# Allegro board CutiePi_V2_0_1126.brd
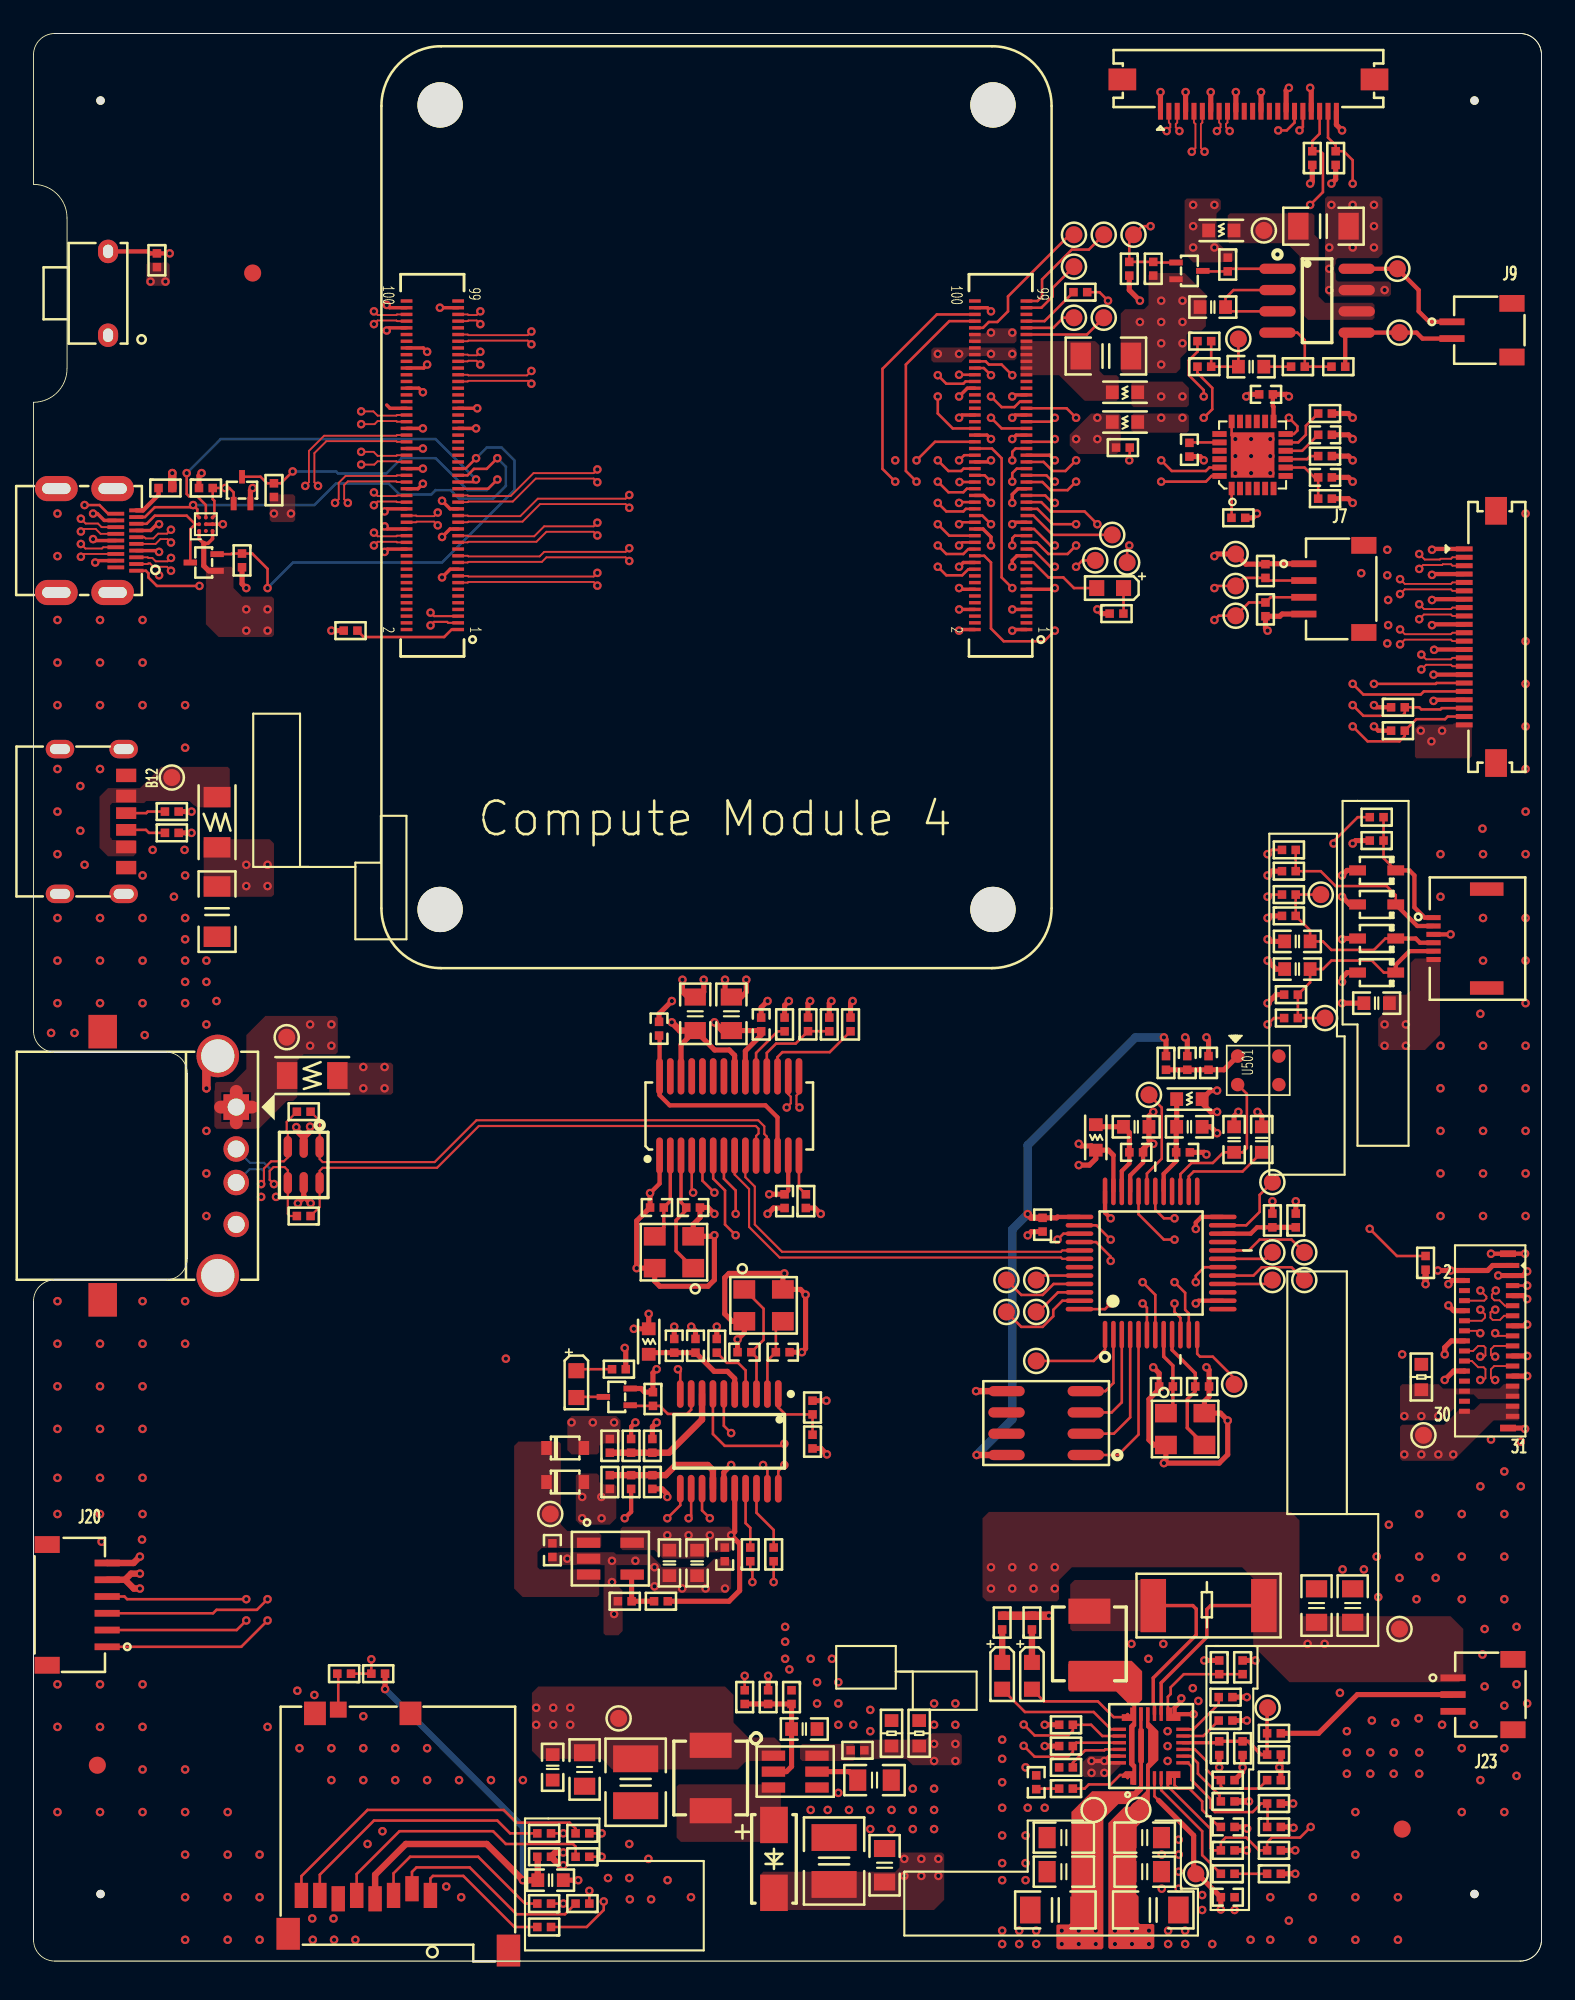
[diagram p0: board, top side]
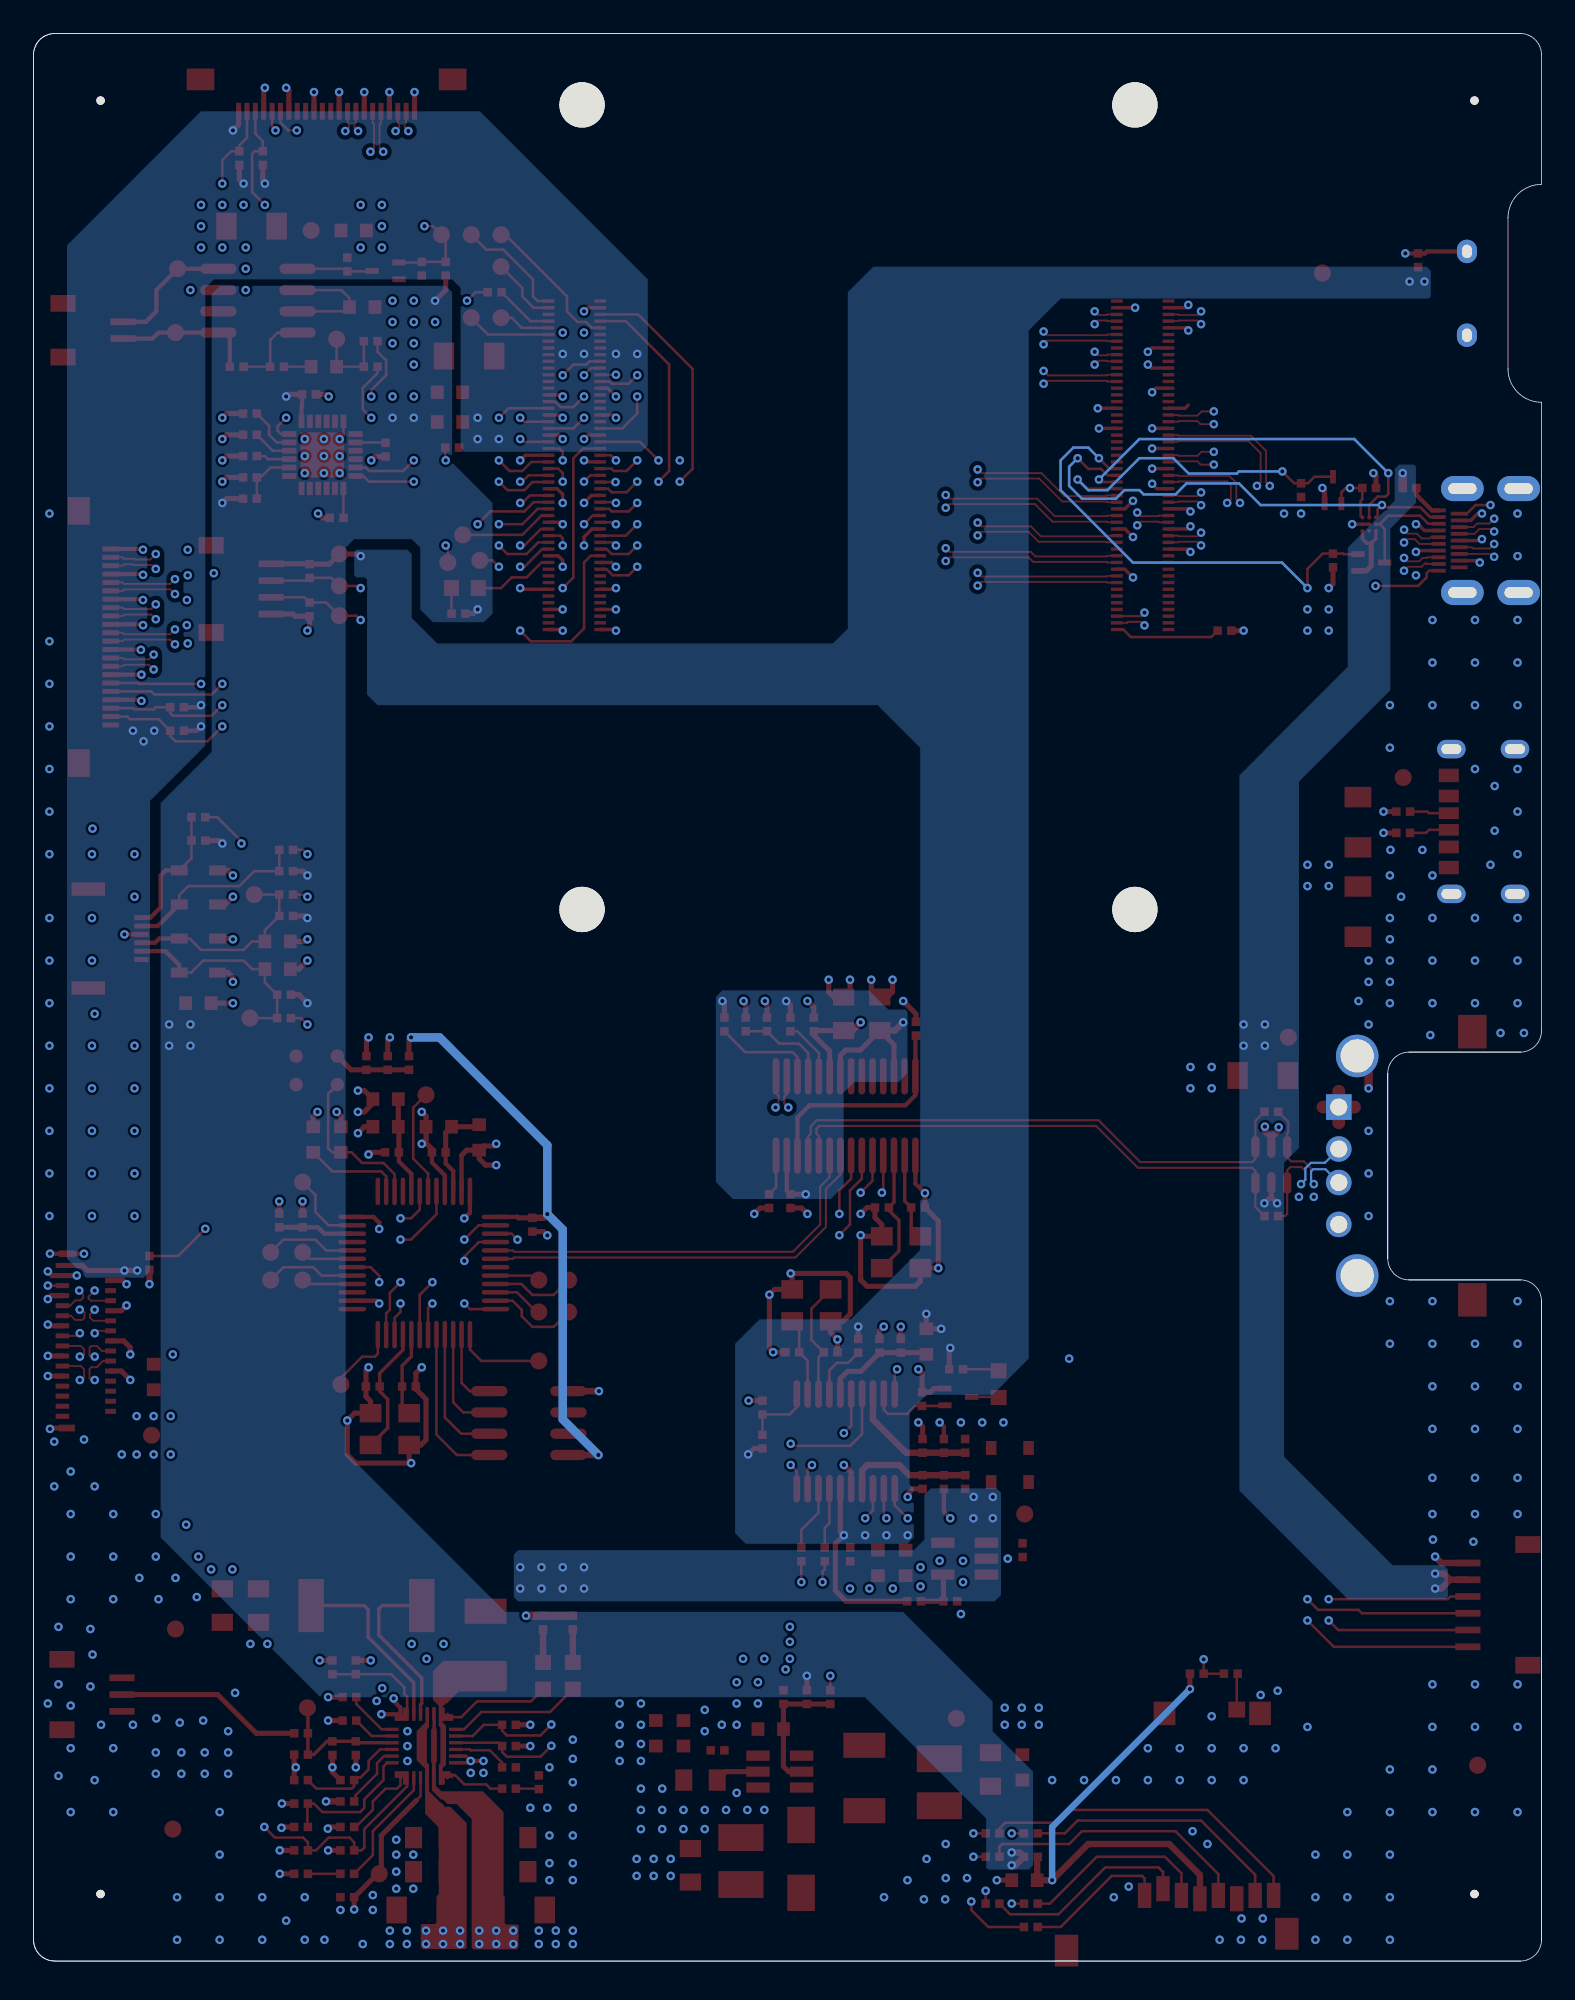
[diagram p1: board, bottom side, seen from below]

Outline 90.01 x 115 mm; copper layers: TOP, GND02, L03, L04, VCC05, BOTTOM. Coordinates in mm from the lower left corner of the outline.
Outline path: 1.27,115 arc(0.37,114.63) 0,113.73 0,106 arc(1.41,105.41) 2,104 2,95 arc(1.41,93.59) 0,93 0,55.5 arc(0.37,54.6) 1.27,54.23 ; 1.27,115 88.74,115 ; 1.27,115 88.74,115 ; 0,39.37 0,1.27 ; 0,39.37 arc(0.37,40.27) 1.27,40.64 ; 0,39.37 0,1.27 ; 0,1.27 arc(0.37,0.37) 1.27,0 ; 1.27,40.64 7.91,40.64 ; 1.27,40.64 7.91,40.64 ; 88.74,115 arc(89.64,114.63) 90.01,113.73 ; 88.74,115 arc(89.64,114.63) 90.01,113.73 ; 1.27,54.23 7.91,54.23 ; 1.27,54.23 7.91,54.23 ; 7.91,54.23 arc(8.81,53.86) 9.18,52.96 ; 7.91,40.64 arc(8.81,41.01) 9.18,41.91 ; 1.27,0 88.74,0 ; 1.27,0 88.74,0 ; 88.74,0 arc(89.64,0.37) 90.01,1.27 ; 88.74,0 arc(89.64,0.37) 90.01,1.27 ; 9.18,52.96 9.18,41.91 ; 9.18,52.96 9.18,41.91 ; 90.01,113.73 90.01,1.27 ; 90.01,113.73 90.01,1.27

## Design rules (mm)
net group CAM0_C: nets CAM0_CN CAM0_CP
net group CAM0_D0: nets CAM0_DN0 CAM0_DP0
net group CAM0_D1: nets CAM0_DN1 CAM0_DP1
net group CAM1_C: nets CAM1_CN CAM1_CP
net group CAM1_D0: nets CAM1_DN0 CAM1_DP0
net group CAM1_D1: nets CAM1_DN1 CAM1_DP1
net group CAM1_D2: nets CAM1_DN2 CAM1_DP2
net group CAM1_D3: nets CAM1_DN3 CAM1_DP3
net group DP_N12951086: nets N12951060 N12951086
net group DSI1_C: nets DSI1_CN DSI1_CP
net group DSI1_D0: nets DSI1_DN0 DSI1_DP0
net group DSI1_D1: nets DSI1_DN1 DSI1_DP1
net group DSI1_D2: nets DSI1_DN2 DSI1_DP2
net group DSI1_D3: nets DSI1_DN3 DSI1_DP3
net group HDMI_CK: nets HDMI_CK_N HDMI_CK_P
net group HDMI_D0: nets HDMI_D0_N HDMI_D0_P
net group HDMI_D1: nets HDMI_D1_N HDMI_D1_P
net group HDMI_D2: nets HDMI_D2_N HDMI_D2_P
net group RXD0: nets N12403491 RXD0
net group TXD0: nets N12403489 TXD0
net group USB: nets USB_N USB_P
net group USB1_: nets USB1_DM USB1_DP
net group USB2_: nets USB2_DM USB2_DP
net group VBUSA: nets N12836963 VBUSA
net group BOOST_EN: nets BOOST_EN CHARGE_EN N12951318

## Placement (name value [footprint] x y rotation side)
C2  47u/6.3V  [C1206]  10.96 62.61 270 top
C20  47u/6.3V  [C1206]  77 103.5 0 top
C24  4.7u/16V  [C0603]  30.86 4.83 0 top
C68  0.1uF/50V  [C0603]  30.99 11.56 270 top
C69  1.0uF/25V  [C0805]  32.89 11.43 270 top
C73  0.1uF/50V  [C0603]  46.01 13.84 0 top
C74  0.22uF/50V  [C0805]  50.2 10.79 0 top
C76  4.7uF/50V  [C1210]  47.79 5.97 90 top
C78  0.22uF/50V  [C0805]  50.8 5.71 90 top
C80  0.1uF/50V  [C0603]  80.17 57.15 180 top
C81  0.1uF/50V  [C0603]  75.44 60.83 180 top
C82  1000pF/50V  [C0603]  75.44 59.18 180 top
C85  4.7uF/50V  [C1210]  35.94 10.67 90 top
C86  4.7u/16V  [C0603]  70.39 98.68 180 top
C87  0.39u/16V  [C0603]  72.68 95.12 0 top
C383  -  [C0402]  77.09 88.52 0 top
C384  -  [C0402]  77.09 91.06 0 top
C385  -  [C0402]  73.57 93.47 180 top
C386  -  [C0402]  68.99 90.17 90 top
C2255  -  [C0402]  37.21 44.96 180 top
C2256  -  [C0402]  39.37 44.96 0 top
C2474  -  [C0402]  39.51 36.71 90 top
C2475  -  [C0402]  44.72 36.33 0 top
C2476  -  [C0402]  42.43 36.33 180 top
C2477  -  [C0402]  41.26 24.26 270 top
C2478  4.7u/16V  [C0603]  39.61 23.75 270 top
C2479  -  [C0402]  38.24 36.71 90 top
C2480  -  [C0402]  30.97 24.52 270 top
C2481  4.7u/16V  [C0603]  37.96 23.75 270 top
C2483  -  [C0402]  59.85 10.67 270 top
C2484  47u/6.3V  [C1206]  60.99 3.05 180 top
C2485  10u/16V  [C0805]  61.5 5.33 180 top
C2486  10u/16V  [C0805]  61.5 7.37 180 top
C2487  47u/6.3V  [C1206]  66.84 3.05 0 top
C2488  10u/16V  [C0805]  66.33 5.33 0 top
C2489  10u/16V  [C0805]  66.33 7.37 0 top
C2490  10u/16V  [C0805]  76.58 21.21 90 top
C2491  10u/16V  [C0805]  78.74 21.21 90 top
C2492  -  [C0402]  71.28 3.81 0 top
C2493  -  [C0402]  71.28 8 0 top
C2494  -  [C0402]  44.83 45.34 270 top
C2495  -  [C0402]  43.43 55.88 90 top
C2496  10u/16V  [C0805]  41.66 56.52 90 top
C2497  10u/16V  [C0805]  39.5 56.52 90 top
C2498  -  [C0402]  37.34 55.63 90 top
C2499  -  [C0402]  69.76 34.28 0 top
C2500  -  [C0402]  67.6 34.28 180 top
C2501  4.7u/16V  [C0603]  68.99 49.77 0 top
C2502  -  [C0402]  68.61 48.25 0 top
C2503  -  [C0402]  65.82 48.25 0 top
C2504  4.7u/16V  [C0603]  65.82 49.77 0 top
C2505  47u/6.3V  [C1206]  64.01 95.76 0 top
C2507  4.7u/16V  [C0603]  73.31 49.01 90 top
C2508  -  [C0402]  68.87 53.58 270 top
C2509  -  [C0402]  70.14 53.58 90 top
C2510  100pF  [C0603]  71.66 49.01 90 top
C2511  -  [C0402]  60.23 43.93 270 top
D1  -  [LED0603]  64.26 81.92 0 top
D10  SS14-M3/61T  [DO-214AC]  44.2 6.1 90 top
D11  ESDLIN1524BJ  [SOD323]  80.17 63.04 0 top
D12  ESDLIN1524BJ  [SOD323]  80.17 65.07 0 top
D13  ESDLIN1524BJ  [SOD323]  80.17 58.97 0 top
D14  ESDLIN1524BJ  [SOD323]  80.17 61.01 0 top
D17  BAT54HT1  [DIO-SOD323]  31.73 30.61 0 top
D18  BAT54HT1  [DIO-SOD323]  31.73 28.58 0 top
D19  -  [LED0603]  32.4 34.42 90 top
D20  -  [LED0603]  57.82 17.02 90 top
D21  -  [LED0603]  59.6 17.02 90 top
F1  6V/2A  [1206]  10.96 67.94 270 top
F2  6V/0.5A  [1206]  16.64 52.83 180 top
FB2  BLM18PG121SH1  [SL0603]  70.9 103.25 0 top
FB7  BLM18PG121SH1  [SL0603]  36.72 36.96 270 top
FB8  BLM18PG121SH1  [SL0603]  63.41 49.14 270 top
FB9  BLM18PG121SH1  [SL0603]  68.99 51.43 0 top
FB10  BLM18PG121SH1  [SL0603]  65.15 93.6 180 top
FB12  BLM18PG121SH1  [SL0603]  65.15 91.82 180 top
J2  Type C  [TYPE_C_P]  3.56 67.99 270 top
J7  -  [SH1_0_4]  75.82 81.87 90 top
J9  -  [SH1_0_2]  84.67 97.3 90 top
J11  -  [MOLEX_54548-2271]  85.4 79 90 top
J13  467651001  [MICRO_HDMI]  5.53 84.75 270 top
J14  -  [USB_AM]  12.1 47.45 0 top
J16  473521001_sd  [MOLEX_473521001]  21.78 7.81 0 top
J17  FH52-6S-0.5SH  [CONFPC6_05MM_FH52]  85.15 61 90 top
J20  -  [SH1_0_6]  4.4 21.25 270 top
J21  FH26W-31S-0.3SHW  [CONFPC31_03MM_FH26W]  86.85 37 90 top
J23  -  [SH1_0_3]  84.73 15.9 90 top
J24  DF40C-100DS-0.4V  [FCI_10033853_CM]  57.73 89.24 270 top
J25  DF40C-100DS-0.4V  [FCI_10033853_CM]  23.81 89.24 270 top
J26  -  [MOLEX_54548-2271]  72.52 110.36 180 top
L5  10uH/20%  [SHC0402]  40.42 10.92 270 top
L634  1.5u  [SHC0402]  63.03 18.92 90 top
NOREF  -  []  40.77 86.74 0 top
NOREF#2  -  [unnamed#2]  86.01 111 0 top
NOREF#3  -  [unnamed#2]  86.01 4 0 top
NOREF#4  -  [unnamed#3]  81.69 7.87 0 top
NOREF#5  -  []  99.99 96.76 0 top
NOREF#6  -  [unnamed#2]  4 111 0 top
NOREF#7  -  [unnamed#2]  4 4 0 top
NOREF#8  -  []  -66.42 36.7 0 top
NOREF#9  -  [unnamed#3]  13.08 100.71 0 top
NOREF#10  -  [unnamed#3]  3.81 11.68 0 top
NOREF#11  -  []  45.34 -8.51 0 top
NOREF#12  -  []  -58.9 96.01 0 top
NOREF#13  -  []  -66.42 -5.33 0 top
Q3  -  [SOT50P160X90-3N]  10.16 83.44 180 top
Q4  -  [SOT50P160X90-3N]  12.45 87.76 90 top
Q5  -  [SOT50P160X90-3N]  34.81 33.66 180 top
Q6  -  [SOT50P160X90-3N]  68.99 100.84 0 top
R3  -  [R0402]  64.64 80.39 0 top
R12  -  [R0402]  18.92 79.38 0 top
R15  -  [R0402]  12.45 83.57 270 top
R16  -  [R0402]  81.44 74.8 0 top
R17  -  [R0402]  81.44 73.41 0 top
R18  -  [R0402]  14.35 87.76 270 top
R42  -  [R0402]  74.93 66.29 180 top
R43  -  [R0402]  80.17 68.25 180 top
R87  -  [R0402]  45.25 15.75 270 top
R88  -  [R0402]  42.45 15.75 90 top
R89  -  [R0402]  49.18 12.57 180 top
R90  3.3/1%  [R0603]  52.87 13.59 90 top
R91  3.3/1%  [R0603]  51.21 13.59 90 top
R114  -  [R0402]  74.93 65.02 180 top
R115  -  [R0402]  80.17 66.85 180 top
R117  -  [R0402]  74.93 62.36 0 top
R118  -  [R0402]  75.06 57.66 0 top
R120  -  [R0402]  75.06 56.26 180 top
R121  -  [R0402]  74.93 63.63 180 top
R122  -  [R0402]  16.13 44.45 180 top
R123  -  [R0402]  16.13 50.67 180 top
R124  -  [R0402]  71.28 101.22 270 top
R125  -  [R0402]  77.88 95.12 180 top
R126  -  [R0402]  75.47 95.12 180 top
R127  -  [R0402]  69.88 96.65 0 top
R128  -  [R0402]  69.88 95.12 0 top
R272  -  [R0402]  40.78 36.71 90 top
R368  -  [R0402]  71.92 86.11 180 top
R370  -  [R0402]  77.09 87.25 180 top
R371  -  [R0402]  77.09 92.33 180 top
R373  -  [R0402]  77.09 89.79 180 top
R3039  -  [R0402]  46.5 33.02 90 top
R3040  -  [R0402]  46.5 30.99 270 top
R3041  -  [R0402]  42.78 24.26 90 top
R3042  -  [R0402]  44.18 24.26 90 top
R3043  -  [R0402]  73.53 82.93 270 top
R3044  -  [R0402]  73.53 80.64 270 top
R3049  -  [R0402]  37.45 21.47 180 top
R3051  -  [R0402]  35.29 21.47 0 top
R3052  -  [R0402]  34.4 28.58 270 top
R3053  -  [R0402]  36.94 28.58 270 top
R3054  -  [R0402]  7.37 101.47 270 top
R3057  -  [R0402]  83.09 41.66 90 top
R3058  -  [R0402]  7.87 87.88 0 top
R3059  -  [R0402]  36.97 33.53 270 top
R3060  -  [R0402]  34.94 35.31 180 top
R3061  -  [R0402]  66.84 100.97 90 top
R3062  -  [R0402]  10.29 87.88 0 top
R3063  NC_3.3/1%  [R0603]  82.84 34.84 90 top
R3064  -  [R0402]  34.4 30.74 90 top
R3065  -  [R0402]  36.94 30.74 90 top
R3066  -  [R0402]  43.85 15.75 270 top
R3086  -  [R0402]  74.04 10.79 180 top
R3087  -  [R0402]  61.63 10.29 0 top
R3088  -  [R0402]  71.28 10.79 180 top
R3089  20m/1W  [R2512]  70.14 21.21 0 top
R3090  -  [R0402]  74.04 9.4 180 top
R3091  -  [R0402]  74.04 8 0 top
R3092  -  [R0402]  74.04 6.6 180 top
R3093  -  [R0402]  71.28 6.6 0 top
R3094  -  [R0402]  61.63 14.1 180 top
R3095  -  [R0402]  57.82 20.19 90 top
R3096  -  [R0402]  61.63 12.83 180 top
R3097  -  [R0402]  71.28 9.53 0 top
R3098  -  [R0402]  74.04 13.59 180 top
R3099  -  [R0402]  61.63 11.56 0 top
R3100  -  [R0402]  59.6 20.19 90 top
R3101  -  [R0402]  70.77 12.7 90 top
R3102  -  [R0402]  70.77 17.53 270 top
R3103  -  [R0402]  72.17 12.7 90 top
R3104  -  [R0402]  72.17 17.53 270 top
R3105  -  [R0402]  71.28 5.21 180 top
R3106  -  [R0402]  71.15 14.35 180 top
R3107  -  [R0402]  71.15 15.75 180 top
R3108  -  [R0402]  74.04 5.21 0 top
R3132  -  [R0402]  20.57 17.14 0 top
R3133  -  [R0402]  8.26 68.58 0 top
R3134  -  [R0402]  8.26 67.31 0 top
R3137  -  [R0402]  74.04 12.32 180 top
R3138  -  [R0402]  30.48 2.03 180 top
R3139  -  [R0402]  32.77 3.43 180 top
R3140  -  [R0402]  30.48 3.43 180 top
R3141  -  [R0402]  32.77 6.22 180 top
R3142  -  [R0402]  30.48 7.62 180 top
R3143  -  [R0402]  32.77 7.62 180 top
R3144  -  [R0402]  18.54 17.14 180 top
R3145  -  [R0402]  65.41 100.97 270 top
R3146  -  [R0402]  76.33 107.57 90 top
R3147  -  [R0402]  77.72 107.57 90 top
R3148  -  [R0402]  46.1 45.34 90 top
R3149  -  [R0402]  48.77 55.88 90 top
R3150  -  [R0402]  46.23 55.88 90 top
R3151  -  [R0402]  47.5 55.88 90 top
R3152  -  [R0402]  44.83 55.88 90 top
R3153  -  [R0402]  30.48 6.22 180 top
R3154  -  [R0402]  35.67 28.58 270 top
R3155  -  [R0402]  35.67 30.74 90 top
R3156  -  [R0402]  62.48 99.57 180 top
R3157  -  [R0402]  65.02 90.3 0 top
R3158  -  [R0402]  67.6 53.58 270 top
R3159  -  [R0402]  75.34 44.19 90 top
R3160  -  [R0402]  73.95 44.19 270 top
REF  val  [unnamed#4]  24.27 110.74 0 top
REF#2  val  [unnamed#4]  57.27 110.74 0 top
REF#3  val  [unnamed#4]  57.27 62.74 0 top
REF#4  val  [unnamed#4]  24.27 62.74 0 top
SW2  TC-0143  [BUTTON]  4.45 99.5 270 top
TP28  TEST POINT  [TESTPOINT_39MIL]  76.83 63.63 90 top
TP29  TEST POINT  [TESTPOINT_39MIL]  77.09 56.26 90 top
TP30  TEST POINT  [TESTPOINT_39MIL]  34.92 14.48 270 top
TP33  TEST POINT  [TESTPOINT_39MIL]  82.96 31.37 0 top
TP41  TEST POINT  [TESTPOINT_39MIL]  8.26 70.61 0 top
TP43  TEST POINT  [TESTPOINT_39MIL]  63.28 9.02 0 top
TP44  TEST POINT  [TESTPOINT_39MIL]  81.53 19.81 0 top
TP45  TEST POINT  [TESTPOINT_39MIL]  69.38 5.21 0 top
TP46  TEST POINT  [TESTPOINT_39MIL]  65.95 9.02 0 top
TP47  TEST POINT  [TESTPOINT_39MIL]  73.66 15.11 0 top
TP52  TEST POINT  [TESTPOINT_39MIL]  15.11 55.12 0 top
TP57  TEST POINT  [TESTPOINT_39MIL]  73.44 103.25 90 top
TP58  TEST POINT  [TESTPOINT_39MIL]  71.92 96.77 90 top
TP59  TEST POINT  [TESTPOINT_39MIL]  65.66 103 90 top
TP60  TEST POINT  [TESTPOINT_39MIL]  81.53 97.16 0 top
TP61  TEST POINT  [TESTPOINT_39MIL]  81.41 100.97 0 top
TP62  TEST POINT  [TESTPOINT_39MIL]  71.75 82.04 270 top
TP63  TEST POINT  [TESTPOINT_39MIL]  71.75 80.26 270 top
TP64  TEST POINT  [TESTPOINT_39MIL]  30.84 26.67 180 top
TP65  TEST POINT  [TESTPOINT_39MIL]  71.75 83.95 270 top
TP67  TEST POINT  [TESTPOINT_39MIL]  59.85 40.63 90 top
TP68  TEST POINT  [TESTPOINT_39MIL]  59.85 35.8 90 top
TP69  TEST POINT  [TESTPOINT_39MIL]  71.66 34.41 90 top
TP70  TEST POINT  [TESTPOINT_39MIL]  73.95 40.63 90 top
TP71  TEST POINT  [TESTPOINT_39MIL]  75.85 40.63 90 top
TP72  TEST POINT  [TESTPOINT_39MIL]  73.95 42.28 90 top
TP73  TEST POINT  [TESTPOINT_39MIL]  75.85 42.28 90 top
TP74  TEST POINT  [TESTPOINT_39MIL]  58.07 40.63 90 top
TP75  TEST POINT  [TESTPOINT_39MIL]  58.07 38.73 90 top
TP76  TEST POINT  [TESTPOINT_39MIL]  59.85 38.73 90 top
TP77  TEST POINT  [TESTPOINT_39MIL]  63.88 98.04 90 top
TP78  TEST POINT  [TESTPOINT_39MIL]  62.1 98.04 90 top
TP79  TEST POINT  [TESTPOINT_39MIL]  62.1 101.09 90 top
TP80  TEST POINT  [TESTPOINT_39MIL]  63.88 103 90 top
TP81  TEST POINT  [TESTPOINT_39MIL]  66.58 51.68 90 top
TP82  TEST POINT  [TESTPOINT_39MIL]  73.95 46.47 90 top
TP83  TEST POINT  [TESTPOINT_39MIL]  62.1 103 90 top
TP84  TEST POINT  [TESTPOINT_39MIL]  65.28 83.44 90 top
TP89  TEST POINT  [TESTPOINT_39MIL]  63.37 83.57 90 top
TP90  TEST POINT  [TESTPOINT_39MIL]  64.39 85.09 90 top
U3  CM108AH  [QFN48_05MM_0707MMLTS]  66.71 41.65 90 top
U4  -  [ONSEMI_ESD5384]  10.29 85.72 90 top
U5  IP4234CZ6  [TSOP6]  16.13 47.5 180 top
U6  -  [SOT23_6B]  45.47 11.3 270 top
U12  LM4871MX  [SOIC8_1D27MM]  76.61 99.06 270 top
U18  stm32f030f4p6  [TSSOP20_0D65MM]  41.53 31.01 180 top
U57  MPU6050  [QFN24_05MM_0404MML]  72.76 89.86 90 top
U60  -  [SOT23_5]  34.43 24.01 270 top
U501  -  [LGA5_CAV_4P1X3P1MM]  71.87 52.29 90 top
U580  AT93C46  [SOIC8]  60.44 32.1 90 top
U597  MP2636GR  [QFN-30]  66.71 12.83 90 top
U600  FE1.1S  [SSOP28]  41.53 50.42 0 top
Y2  -  [XTAL-3225_25M]  43.58 39.12 180 top
Y10  -  [XTAL-3225_25M]  38.23 42.29 0 top
Y11  -  [XTAL-3225_25M]  68.74 31.74 180 top

## Library data of the parts
C2 C20 C2484 C2487 C2505 = CAP_3216_6.3V_47u: Tolerance: tol*
C24 C86 C87 C2478 C2481 C2501 C2504 C2507 = CAP_1608_6.3V_4.7u: Tolerance: tol*
C68 C69 C73 C74 C76 C78 C82 C85 C2510 = CAP: Tolerance: tol*
C80 C81 = CAP_0: Tolerance: tol*
C383-C386 C2474 C2477 C2479 C2483 C2492-C2495 C2498 C2502 C2503 C2508 C2509 C2511 = CAP_1005_6.3V_100n
C2255 C2256 C2499 C2500 = CAP_NP: signal model: DEFAULT_CAPACITOR_10000pF_2_1; room: ATLAS-AP
C2475 C2476 = C_0603_22P/50V/5%
C2480 = CAP_1005_6.3V_1u
C2485 C2486 C2488-C2491 C2496 C2497 = CAP_2012_6.3V_10u: Tolerance: tol*
D1 = LED_1608_RED_0
D10 = S100: User Part Number: pn
D11-D14 = SMAJ30CA: User Part Number: PN
D17 D18 = DIODE_0: User Part Number: PN
D19-D21 = LED_1608_GREEN_0
F1 F2 = FUSE_POLY_2.0A_6V: Tolerance: tol*
FB2 FB7-FB10 FB12 = INDUCTOR_0: Tolerance: tol*; room: USB+5V
J2 = CON_uUSB_B_3: User Part Number: PN
J7 = A2002WV-6P_7
J9 = A2002WV-6P_8
J11 J26 = CON_22W_FFC_54548-2271
J13 = CON_HDMI_RA: User Part Number: PN
J14 = CON_USBA_RA_PTH_0
J16 = CON_uSD_2: User Part Number: PN
J17 = A2002WV-6P_3: User Part Number: PN
J20 = A2002WV-6P_2
J21 = CON32_1: User Part Number: PN
J23 = A2002WV-6P_4
J24 J25 = CON_200W_DDR2SODIMM_CM_2: User Part Number: PN
L5 = IND: User Part Number: pn
L634 = IND_4u7_SRN4018-4R7M: User Part Number: pn
Q3-Q6 = MOSFET_N_DMG1012T
R3 R3060 = RES_1005_470R
R12 = RES_1005_1K
R15 = RES_1005_27K
R16 R17 R3146 R3147 = RES_1005_1.8K
R18 R3059 R3061 R3062 R3133 R3134 R3145 R3159 R3160 = RES_1005_100K
R42 R43 R87-R89 R120-R123 R127 R128 R368 R370 R371 R373 R3052 R3057 R3064 R3066 R3086-R3088 R3090-R3093 R3095 R3097-R3108 R3137 R3148-R3158 = RES
R90 R91 R3063 R3089 = RES: Tolerance: tol*
R114 R115 R117 R118 R124-R126 R3049 R3051 R3053 R3065 = RES_0
R272 R3054 = R_0603_10K/5%
R3039 R3040 = R_0402_22R/5%
R3041 R3042 R3058 R3094 R3096 = R_1: signal model: DEFAULT_RESISTOR_0.001OHM_1_2
R3043 R3044 = R_0603/4.7K/5%
R3132 R3138-R3144 = RES_1005_47K
REF REF#2-REF#4 = -: User Part Number: pn
SW2 = SKEG_DIP2_2: User Part Number: PN
TP28-TP30 TP33 TP41 TP43-TP47 TP52 TP57-TP65 TP67-TP84 TP89 TP90 = Test pad: Tolerance: *; User Part Number: *; room: P10-PMIC
U3 = LSD4WF-00007010_0: User Part Number: pn
U4 = IC_ESD5384_1
U5 = TMP100-Q1_0: User Part Number: pn
U6 = TPS61165TDB
U12 = SMD_EEPROM_SO8_0: User Part Number: pn
U18 = XF6000SYE_1: User Part Number: pn
U57 = TUSB1210BRHBT_2: User Part Number: PN
U60 = LP3470/SOT23_1
U501 = ADMP421_LGA5_1
U580 = PCA9306IDCURQ1_0: User Part Number: pn
U597 = STM8AF6226TA_5: User Part Number: PN
U600 = NEO-M8L_0: User Part Number: pn
Y2 = X_0
Y10 Y11 = XTAL_13Y

## Footprints (pads in the part's own frame, mm; a bottom-side part is the same pattern mirrored in y, then rotated)
1206
  rect 1.219x1.6 smd: 1(-1.5,0) 2(1.5,0)
BUTTON
  oval 1.4x1.2 hole 0.8x0.6: 1(2.5,0) 2(-2.5,0)
C0402
  rect 0.508x0.508 smd: 1(-0.41,0) 2(0.41,0)
C0603
  rect 0.762x0.813 smd: 1(-0.76,0) 2(0.76,0)
C0805
  rect 1.016x1.27 smd: 1(-1,0) 2(1,0)
C1206
  rect 1.219x1.6 smd: 1(-1.5,0) 2(1.5,0)
C1210
  rect 1.6x2.692 smd: 1(-1.4,0) 2(1.4,0)
CONFPC6_05MM_FH52
  rect 0.3x0.85 smd: 1(1.25,1.587) 2(0.75,1.587) 3(0.25,1.587) 4(-0.25,1.587) 5(-0.75,1.587) 6(-1.25,1.587)
  rect 0.8x2 smd: 7(-2.95,-1.587) 8(2.95,-1.587)
CONFPC31_03MM_FH26W
  rect 0.3x0.8 smd: 1(4.5,-1.437) 3(3.9,-1.437) 5(3.3,-1.437) 7(2.7,-1.437) 9(2.1,-1.437) 11(1.5,-1.437) 13(0.9,-1.437) 15(0.3,-1.437) 17(-0.3,-1.437) 19(-0.9,-1.437) 21(-1.5,-1.437) 23(-2.1,-1.437) 25(-2.7,-1.437) 27(-3.3,-1.437) 29(-3.9,-1.437) 31(-4.5,-1.437)
  rect 0.3x0.65 smd: 2(4.2,1.437) 4(3.6,1.437) 6(3,1.437) 8(2.4,1.437) 10(1.8,1.437) 12(1.2,1.437) 14(0.6,1.437) 16(0,1.437) 18(-0.6,1.437) 20(-1.2,1.437) 22(-1.8,1.437) 24(-2.4,1.437) 26(-3,1.437) 28(-3.6,1.437) 30(-4.2,1.437)
  rect 0.4x0.95 smd: G1(-5.2,-1.165) G2(5.2,-1.165)
DIO-SOD323
  rect 0.63x0.83 smd: 1(-1.115,0) 2(1.115,0)
DO-214AC
  rect 2.17x1.65 smd: A(2.025,0) C(-2.025,0)
FCI_10033853_CM
  rect 0.2x0.7 smd: 1(9.8,1.54) 2(9.8,-1.54) 3(9.4,1.54) 4(9.4,-1.54) 5(9,1.54) 6(9,-1.54) 7(8.6,1.54) 8(8.6,-1.54) 9(8.2,1.54) 10(8.2,-1.54) 11(7.8,1.54) 12(7.8,-1.54) 13(7.4,1.54) 14(7.4,-1.54) 15(7,1.54) 16(7,-1.54) 17(6.6,1.54) 18(6.6,-1.54) 19(6.2,1.54) 20(6.2,-1.54) 21(5.8,1.54) 22(5.8,-1.54) 23(5.4,1.54) 24(5.4,-1.54) 25(5,1.54) 26(5,-1.54) 27(4.6,1.54) 28(4.6,-1.54) 29(4.2,1.54) 30(4.2,-1.54) 31(3.8,1.54) 32(3.8,-1.54) 33(3.4,1.54) 34(3.4,-1.54) 35(3,1.54) 36(3,-1.54) 37(2.6,1.54) 38(2.6,-1.54) 39(2.2,1.54) 40(2.2,-1.54) 41(1.8,1.54) 42(1.8,-1.54) 43(1.4,1.54) 44(1.4,-1.54) 45(1,1.54) 46(1,-1.54) 47(0.6,1.54) 48(0.6,-1.54) 49(0.2,1.54) 50(0.2,-1.54) 51(-0.2,1.54) 52(-0.2,-1.54) 53(-0.6,1.54) 54(-0.6,-1.54) 55(-1,1.54) 56(-1,-1.54) 57(-1.4,1.54) 58(-1.4,-1.54) 59(-1.8,1.54) 60(-1.8,-1.54) 61(-2.2,1.54) 62(-2.2,-1.54) 63(-2.6,1.54) 64(-2.6,-1.54) 65(-3,1.54) 66(-3,-1.54) 67(-3.4,1.54) 68(-3.4,-1.54) 69(-3.8,1.54) 70(-3.8,-1.54) 71(-4.2,1.54) 72(-4.2,-1.54) 73(-4.6,1.54) 74(-4.6,-1.54) 75(-5,1.54) 76(-5,-1.54) 77(-5.4,1.54) 78(-5.4,-1.54) 79(-5.8,1.54) 80(-5.8,-1.54) 81(-6.2,1.54) 82(-6.2,-1.54) 83(-6.6,1.54) 84(-6.6,-1.54) 85(-7,1.54) 86(-7,-1.54) 87(-7.4,1.54) 88(-7.4,-1.54) 89(-7.8,1.54) 90(-7.8,-1.54) 91(-8.2,1.54) 92(-8.2,-1.54) 93(-8.6,1.54) 94(-8.6,-1.54) 95(-9,1.54) 96(-9,-1.54) 97(-9.4,1.54) 98(-9.4,-1.54) 99(-9.8,1.54) 100(-9.8,-1.54)
LED0603
  rect 0.9x0.95 smd: 1(0.8,0) 2(-0.8,0)
LGA5_CAV_4P1X3P1MM
  round 0.8 smd: 1(1.7,0) 2(1.7,-2.46) 3(0,-2.46) 4(0,0)
MICRO_HDMI
  rect 0.23x0.85 smd: 1(1.8,0.612) 3(1.4,0.612) 5(1,0.612) 7(0.6,0.612) 9(0.2,0.612) 11(-0.2,0.612) 13(-0.6,0.612) 15(-1,0.612) 17(-1.4,0.612) 19(-1.8,0.612)
  rect 0.23x1 smd: 2(1.6,-0.612) 4(1.2,-0.612) 6(0.8,-0.612) 8(0.4,-0.612) 10(0,-0.612) 12(-0.4,-0.612) 14(-0.8,-0.612) 16(-1.2,-0.612) 18(-1.6,-0.612)
  oval 1.5x2.55 hole 0.65x1.7: 20(3.1,-4.163) 21(-3.1,-0.802) 22(3.1,-0.802) 23(-3.1,-4.163)
MOLEX_54548-2271
  rect 1.65x1.3 smd: (-7.525,-1.9) (7.525,-1.9)
  rect 0.3x1 smd: 1(5.25,0) 2(4.75,0) 3(4.25,0) 4(3.75,0) 5(3.25,0) 6(2.75,0) 7(2.25,0) 8(1.75,0) 9(1.25,0) 10(0.75,0) 11(0.25,0) 12(-0.25,0) 13(-0.75,0) 14(-1.25,0) 15(-1.75,0) 16(-2.25,0) 17(-2.75,0) 18(-3.25,0) 19(-3.75,0) 20(-4.25,0) 21(-4.75,0) 22(-5.25,0)
MOLEX_473521001
  rect 0.8x1.5 smd: 1(1.915,-3.898) 2(0.815,-3.498) 3(-0.285,-3.898) 4(-1.385,-4.098) 5(-2.485,-3.898) 6(-3.585,-4.098) 7(-4.685,-3.898) 8(-5.785,-3.898)
  rect 1x0.95 smd: 9(-3.585,7.187)
  rect 1.4x1.9 smd: 10(6.575,-7.187) 11(-6.575,-6.187)
  rect 1.3x1.4 smd: 12(-4.975,6.962) 13(0.725,6.962)
ONSEMI_ESD5384
  round 0.235 smd: A1(-0.4,0.4) A2(0,0.4) A3(0.4,0.4) B1(-0.4,0) B2(0,0) B3(0.4,0) C1(-0.4,-0.4) C2(0,-0.4) C3(0.4,-0.4)
QFN24_05MM_0404MML
  rect 0.8x0.35 smd: 1(-2,1.25) 2(-2,0.75) 3(-2,0.25) 4(-2,-0.25) 5(-2,-0.75) 6(-2,-1.25) 13(2,-1.25) 14(2,-0.75) 15(2,-0.25) 16(2,0.25) 17(2,0.75) 18(2,1.25)
  rect 0.35x0.85 smd: 7(-1.25,-1.975) 8(-0.75,-1.975) 9(-0.25,-1.975) 10(0.25,-1.975) 11(0.75,-1.975) 12(1.25,-1.975) 19(1.25,1.975) 20(0.75,1.975) 21(0.25,1.975) 22(-0.25,1.975) 23(-0.75,1.975) 24(-1.25,1.975)
  rect 2.7x2.6 smd: 25(0,0)
QFN48_05MM_0707MMLTS
  oval 1.65x0.27 smd: 1(-4.275,2.75) 2(-4.275,2.25) 3(-4.275,1.75) 4(-4.275,1.25) 5(-4.275,0.75) 6(-4.275,0.25) 7(-4.275,-0.25) 8(-4.275,-0.75) 9(-4.275,-1.25) 10(-4.275,-1.75) 11(-4.275,-2.25) 12(-4.275,-2.75) 25(4.275,-2.75) 26(4.275,-2.25) 27(4.275,-1.75) 28(4.275,-1.25) 29(4.275,-0.75) 30(4.275,-0.25) 31(4.275,0.25) 32(4.275,0.75) 33(4.275,1.25) 34(4.275,1.75) 35(4.275,2.25) 36(4.275,2.75)
  oval 0.27x1.65 smd: 13(-2.75,-4.275) 14(-2.25,-4.275) 15(-1.75,-4.275) 16(-1.25,-4.275) 17(-0.75,-4.275) 18(-0.25,-4.275) 19(0.25,-4.275) 20(0.75,-4.275) 21(1.25,-4.275) 22(1.75,-4.275) 23(2.25,-4.275) 24(2.75,-4.275) 37(2.75,4.275) 38(2.25,4.275) 39(1.75,4.275) 40(1.25,4.275) 41(0.75,4.275) 42(0.25,4.275) 43(-0.25,4.275) 44(-0.75,4.275) 45(-1.25,4.275) 46(-1.75,4.275) 47(-2.25,4.275) 48(-2.75,4.275)
QFN-30
  custom 0.8x0.7 smd: 1(-1.9,1.4) 8(-1.9,-1.4) 15(1.9,-1.4) 22(1.9,1.4)
  rect 0.8x0.2 smd: 2(-1.9,1) 3(-1.9,0.6) 4(-1.9,0.2) 5(-1.9,-0.2) 6(-1.9,-0.6) 7(-1.9,-1) 16(1.9,-1) 17(1.9,-0.6) 18(1.9,-0.2) 19(1.9,0.2) 20(1.9,0.6) 21(1.9,1)
  rect 0.2x0.8 smd: 9(-1,-1.9) 10(-0.6,-1.9) 11(-0.2,-1.9) 12(0.2,-1.9) 13(0.6,-1.9) 14(1,-1.9) 23(1,1.9) 24(0.6,1.9) 25(0.2,1.9) 26(-0.2,1.9) 27(-0.6,1.9) 28(-1,1.9)
  rect 1.8x0.3 smd: 29(0,0.6) 30(0,0)
R0402
  rect 0.508x0.508 smd: 1(-0.41,0) 2(0.41,0)
R0603
  rect 0.762x0.813 smd: 1(-0.76,0) 2(0.76,0)
R2512
  rect 1.524x3.175 smd: 1(-3.3,0) 2(3.3,0)
SH1_0_2
  rect 1x1.5 smd: (-1.6,-3.58) (1.6,-3.58)
  rect 0.4x1.5 smd: 1(0.5,0) 2(-0.5,0)
SH1_0_3
  rect 1x1.5 smd: (-2.1,-3.58) (2.1,-3.58)
  rect 0.4x1.5 smd: 1(1,0) 2(0,0) 3(-1,0)
SH1_0_4
  rect 1x1.5 smd: (-2.6,-3.58) (2.6,-3.58)
  rect 0.4x1.5 smd: 1(1.5,0) 2(0.5,0) 3(-0.5,0) 4(-1.5,0)
SH1_0_6
  rect 1x1.5 smd: (-3.6,-3.58) (3.6,-3.58)
  rect 0.4x1.5 smd: 1(2.5,0) 2(1.5,0) 3(0.5,0) 4(-0.5,0) 5(-1.5,0) 6(-2.5,0)
SHC0402
  rect 1.5x2.5 smd: 1(-1.95,0) 2(1.95,0)
SL0603
  rect 0.762x0.813 smd: 1(-0.76,0) 2(0.76,0)
SOD323
  rect 1x0.6 smd: A(-1.14,0) C(1.14,0)
SOIC8
  oval 0.61x2.17 smd: 1(-1.905,-2.365) 2(-0.635,-2.365) 3(0.635,-2.365) 4(1.905,-2.365) 5(1.905,2.365) 6(0.635,2.365) 7(-0.635,2.365) 8(-1.905,2.365)
SOIC8_1D27MM
  oval 0.61x2.17 smd: 1(-1.905,-2.365) 2(-0.635,-2.365) 3(0.635,-2.365) 4(1.905,-2.365) 5(1.905,2.365) 6(0.635,2.365) 7(-0.635,2.365) 8(-1.905,2.365)
SOT23_5
  rect 0.61x1.397 smd: 1(-0.95,-1.3) 2(0,-1.3) 3(0.95,-1.3) 4(0.95,1.3) 5(-0.95,1.3)
SOT23_6B
  rect 0.61x1.397 smd: 1(-0.95,-1.3) 2(0,-1.3) 3(0.95,-1.3) 4(0.95,1.3) 5(0,1.3) 6(-0.95,1.3)
SOT50P160X90-3N
  rect 0.8x0.35 smd: 1(-0.8,0.5) 2(-0.8,-0.5) 3(0.8,0)
SSOP28
  oval 0.4x2.17 smd: 1(-4.16,-2.365) 2(-3.52,-2.365) 3(-2.88,-2.365) 4(-2.24,-2.365) 5(-1.6,-2.365) 6(-0.96,-2.365) 7(-0.32,-2.365) 8(0.32,-2.365) 9(0.96,-2.365) 10(1.6,-2.365) 11(2.24,-2.365) 12(2.88,-2.365) 13(3.52,-2.365) 14(4.16,-2.365) 15(4.16,2.365) 16(3.52,2.365) 17(2.88,2.365) 18(2.24,2.365) 19(1.6,2.365) 20(0.96,2.365) 21(0.32,2.365) 22(-0.32,2.365) 23(-0.96,2.365) 24(-1.6,2.365) 25(-2.24,2.365) 26(-2.88,2.365) 27(-3.52,2.365) 28(-4.16,2.365)
TESTPOINT_39MIL
  round 1.016 smd: 1(0,0)
TSOP6
  oval 0.5x1.3 smd: 1(-0.95,-1.075) 2(0,-1.075) 3(0.95,-1.075) 4(0.95,1.075) 5(0,1.075) 6(-0.95,1.075)
TSSOP20_0D65MM
  oval 0.4x1.65 smd: 1(-2.925,-2.825) 2(-2.275,-2.825) 3(-1.625,-2.825) 4(-0.975,-2.825) 5(-0.325,-2.825) 6(0.325,-2.825) 7(0.975,-2.825) 8(1.625,-2.825) 9(2.275,-2.825) 10(2.925,-2.825) 11(2.925,2.825) 12(2.275,2.825) 13(1.625,2.825) 14(0.975,2.825) 15(0.325,2.825) 16(-0.325,2.825) 17(-0.975,2.825) 18(-1.625,2.825) 19(-2.275,2.825) 20(-2.925,2.825)
TYPE_C_P
  oval 1.1x1.7 hole 0.6x1.2: 1(-4.32,1.825) 2(-4.32,-1.975) 3(4.32,-1.975) 4(4.32,1.825)
  rect 0.7x1.2 smd: A5(-0.5,1.975) B5(0.5,1.975)
  rect 0.76x1.2 smd: A9(1.52,1.975) B9(-1.52,1.975)
  rect 0.8x1.2 smd: A12(2.75,1.975) B12(-2.75,1.975)
unnamed#2
  round 0.5 hole 3.4 unplated: (0,0)
unnamed#3
  round 1.016 smd: (0,0)
unnamed#4
  round 2.7 hole 2.7 unplated: (0,0)
USB_AM
  rect 1.524x1.524 hole 1.016: 1(0,3.5)
  round 1.524 hole 1.016: 2(0,1) 3(0,-1) 4(0,-3.5)
  round 2.54 hole 1.981: 5(-1.1,6.55) 6(-1.1,-6.55)
  rect 1.7x2 smd: 7(-7.97,8) 8(-7.97,-8)
XTAL-3225_25M
  rect 1.3x1.1 smd: 1(1.15,-0.95) 2(-1.15,-0.95) 3(-1.15,0.95) 4(1.15,0.95)

## Nets
3V3: C80.1 C385.1 FB12.1 J17.6 R3.1 R114.2 R115.2 R117.1 R118.1 R370.1(A) R3066.1(A) R3145.2 R3153.1(A) U57.13(VDD)
3V3_SD: C24.1 J16.4(VDD) R3132.2 R3153.2(B)
5V: C2.1 C2487.1 C2488.1 C2489.1 D17.2 F1.2(P2) R3064.2(B) R3091.2(B) R3093.2(B) TP46.1(PIN1) U597.4(VIN1) U597.19(VIN3) U597.30(VIN2)
GND: C2.2 C20.2 C24.2 C68.2 C69.2 C73.2 C74.2 C76.2 C78.2 C80.2 C81.2 C82.2 C85.1 C86.2 C383.2 C384.2 C385.2 C386.1 C2255.2 C2256.2 C2474.2 C2475.2 C2476.2 C2477.2 C2478.2 C2479.2 C2480.2 C2481.2 C2483.1 C2484.2 C2485.2 C2486.2 C2487.2 C2488.2 C2489.2 C2490.2 C2491.2 C2492.2 C2493.2 C2494.2 C2495.2 C2496.2 C2497.2 C2498.2 C2499.2 C2500.2 C2501.2 C2502.2 C2503.2 C2504.2 C2505.2 C2507.2 C2508.1 C2509.2 C2510.2 C2511.2 D11.A D12.A D13.A D14.A J2.1(SH1) J2.2(SH2) J2.3(SH3) J2.4(SH4) J2.A12 J2.B12 J7.4 J11.1(P1) J11.4(P4) J11.7(P7) J11.10(P10) J11.13(P13) J11.16(P16) J11.19(P19) J13.4(P4) J13.7(P7) J13.10(P10) J13.13(P13) J13.16(P16) J13.20(SH1) J13.21(SH2) J13.22(SH3) J13.23(SH4) J14.4(P4) J14.5(P5) J14.6(P6) J14.7(P7) J14.8(P8) J16.6(VSS) J16.10(SH1) J16.11(SH2) J16.12(SH3) J16.13(SH4) J17.3 J17.7(G1) J17.8(G2) J20.6 J21.4 J21.7 J21.10 J21.13 J21.16 J21.19 J21.22 J21.23 J21.G1 J21.G2 J23.3 J24.1 J24.2 J24.7 J24.8 J24.13 J24.14 J24.22 J24.23 J24.32 J24.33 J24.42 J24.43 J24.52 J24.53 J24.59 J24.60 J24.65 J24.66 J24.71 J24.74 J24.98 J25.7 J25.8 J25.13 J25.14 J25.19 J25.20 J25.25 J25.26 J25.31 J25.32 J25.37 J25.38 J25.44 J25.50 J25.55 J25.56 J25.61 J25.62 J25.67 J25.68 J25.73 J25.74 J25.79 J25.80 J25.85 J25.86 J25.91 J25.92 J25.97 J25.98 J26.1(P1) J26.4(P4) J26.7(P7) J26.10(P10) J26.13(P13) J26.16(P16) J26.19(P19) Q4.2(S) Q5.2(S) Q6.2(S) R12.1 R87.1(A) R90.2(B) R91.2(B) R368.1(A) R371.1(A) R373.1(A) R3039.2 R3044.2 R3051.1 R3053.2 R3059.1 R3061.1 R3062.1 R3063.2(B) R3065.2 R3088.1(A) R3090.1(A) R3092.1(A) R3099.1(A) R3103.1(A) R3104.1(A) R3106.1(A) R3107.1(A) R3108.2(B) R3133.2 R3134.2 R3148.1(A) R3150.2(B) R3160.1 SW2.1 U3.14(DVSS1) U3.24(AVSS1) U3.33(AVSS2) U3.36(DVSS2) U4.B2(COM1) U4.C2(COM0) U5.2(GND) U6.4(GND) U12.7(GND) U18.15(VSS) U57.18(GND) U57.25(G) U60.2(GND) U501.2(GND1) U501.3(GND2) U580.5(GND) U597.15(AGND) U597.27(PGND1) U597.28(PGND2) U600.1(VSS) Y2.2 Y2.4 Y10.2 Y10.4 Y11.2 Y11.4
VBAT: C2490.1 C2491.1 D18.2 J23.1 R3052.2(B) R3089.2(B) R3095.2(B) R3097.2(B) R3100.2(B) TP44.1(PIN1) U597.17(BAT)
VBAT_AD: R3052.1(A) R3053.1 R3154.1(A) U18.14(ADC_9)
VBAT_AD_C: J24.94 R3154.2(B)
VBUS: C68.1 C69.1 C85.2 C2484.1 C2485.1 C2486.1 C2495.1 C2496.1 F2.1(P1) FB2.1 FB8.2 FB9.2 FB10.1 L5.1 Q3.1(G) R124.1 R3086.1(A) R3101.1(A) R3137.1(A) R3151.2(B) TP30.1(PIN1) TP43.1(PIN1) U3.35(DVDD) U4.A1(5V) U4.C1(I2C_5V) U6.1(VIN) U597.3(SYS1) U597.20(SYS3) U597.29(SYS2) U600.20(VDD5)
VBUSA: F2.2(P2) J14.1(P1) J20.5 R3058.2 TP52.1(PIN1) U5.5(PW)
VDD_AMP: C20.1 FB2.2 TP57.1(PIN1) U12.6(VDD)
VDDA: C2474.1 C2479.1 FB7.2 U18.5(VDDA)
ADSEL: R3159.1 R3160.2 U3.22(ADSEL)
AMP_SHUTDOWN: J24.45 Q6.1(G) R3061.2 R3145.1 TP59.1(PIN1)
AU_XIN: C2500.1 U3.8(XI) Y11.1
AU_XOUT: C2499.1 U3.9(XO) Y11.3
BL_EN: J24.31 R88.2(B)
BOOST_EN: R3094.1 U18.11(SPI1_CLK) U597.24(MODE)
BT_NDIS: J24.91 TP78.1(PIN1)
CAM0_CN: J25.40 J26.8(P8)
CAM0_CP: J25.42 J26.9(P9)
CAM0_DN0: J25.28 J26.2(P2)
CAM0_DN1: J25.34 J26.5(P5)
CAM0_DP0: J25.30 J26.3(P3)
CAM0_DP1: J25.36 J26.6(P6)
CAM0_IO0: J24.27 J26.17(P17)
CAM0_IO1: J24.26 J26.18(P18)
CAM1_CN: J11.8(P8) J25.27
CAM1_CP: J11.9(P9) J25.29
CAM1_DN0: J11.2(P2) J25.15
CAM1_DN1: J11.5(P5) J25.21
CAM1_DN2: J11.11(P11) J25.33
CAM1_DN3: J11.14(P14) J25.39
CAM1_DP0: J11.3(P3) J25.17
CAM1_DP1: J11.6(P6) J25.23
CAM1_DP2: J11.12(P12) J25.35
CAM1_DP3: J11.15(P15) J25.41
CAM1_IO0: J11.17(P17) J24.34
CAM1_IO1: J11.18(P18) J24.54
CAM_GPIO: J24.97 TP79.1(PIN1)
CHARGE_EN: R3096.1 U18.12(SPI1_MISO) U597.25(EN)
CM_1V8: J21.3 J24.88 J24.90 R3057.1(A)
CM_3V3: FB12.2 J11.22(P22) J21.1 J21.2 J24.84 J24.86 J26.22(P22) R15.2 R16.1 R17.1 R18.2 R3146.1 R3147.1 R3157.1(A)
CM_5V: C2505.1 FB10.2 J24.77 J24.79 J24.81 J24.83 J24.85 J24.87
DM3: J20.1 U600.6(DM3)
DM4: J20.3 U600.4(DM4)
DP3: J20.2 U600.7(DP3)
DP4: J20.4 U600.5(DP4)
DSI1_CN: J21.14 J25.87
DSI1_CP: J21.15 J25.89
DSI1_DN0: J21.11 J25.75
DSI1_DN1: J21.17 J25.81
DSI1_DN2: J21.20 J25.93
DSI1_DN3: J21.8 J25.94
DSI1_DP0: J21.12 J25.77
DSI1_DP1: J21.18 J25.83
DSI1_DP2: J21.21 J25.95
DSI1_DP3: J21.9 J25.96
E2P_CS: U3.5(CS) U580.1(CS)
E2P_DI: U3.2(DI) U580.4(DO)
E2P_DO: U3.3(DO) U580.3(DI)
E2P_SK: U3.4(SK) U580.2(SK)
EEPROM_WP: J24.20 TP84.1(PIN1)
GLOBAL_EN: J24.99 TP80.1(PIN1)
GPIO_VEF(IN): J24.78 R3157.2(B)
GYRO_INT: J24.48 U57.12(INT)
HDMI1_SCL: J13.17(P17) J25.47 U4.A3(SCL)
HDMI1_SDA: J13.18(P18) J25.45 U4.B3(SDA)
HDMI_CEC: J25.49 Q3.2(S) R15.1
HDMI_CK_N: J13.14(P14) J25.66
HDMI_CK_P: J13.12(P12) J25.64
HDMI_D0_N: J13.11(P11) J25.60
HDMI_D0_P: J13.9(P9) J25.58
HDMI_D1_N: J13.8(P8) J25.54
HDMI_D1_P: J13.6(P6) J25.52
HDMI_D2_N: J13.5(P5) J25.48
HDMI_D2_P: J13.3(P3) J25.46
HDMI_HPD: J13.1(P1) Q4.1(G) R3062.2 U4.C3(HPD)
HDMI_HPD_N: J25.43 Q4.3(D) R18.1
HOOK: J24.41 U3.11(HOOK)
ID_SC: J24.35 TP90.1(PIN1)
ID_SD: J24.36 TP89.1(PIN1)
IN2SYS_EN: R3092.2(B) R3093.1(A) U18.13(SPI1_MOSI) U597.7(PWIN)
LCD_RST: J21.5 J24.30 R3057.2(B)
LOL: R127.1(A) U3.30(LOL)
LOR: R128.1(A) U3.32(LOR)
MCU_3V3: C2477.1 C2478.1 C2481.1 FB7.1 J7.1 R272.2 R3040.2 R3043.1 R3049.1 R3054.2 R3060.1 TP65.1(PIN1) U18.16(VDD) U60.5(OUT)
MCU_IND: Q5.1(G) R3059.2 U18.9(ADC_3)
MCU_REV1: J24.28 U18.6(PA0)
MCU_REV2: R3156.1(A) U18.7(PA1)
MCU_RST: R272.1 U18.4(NRST)
MICIN: C2510.1 U3.27(MICIN) U501.4(OUTPUT)
MODE: J24.40 U3.10(MODE)
MSEL: J24.50 U3.38(MSEL)
MUTEP: J24.49 U3.18(MUTEP)
MUTER: J24.37 U3.6(MUTER)
NRPIBOOT: J24.93 R3156.2(B)
OSC_IN: C2475.1 U18.2(OSC_IN) Y2.3
OSC_OUT: C2476.1 U18.3(OSC_OUT) Y2.1
PDSW: J24.29 U3.40(PDSW)
PI_NLED_ACTIVITY: D1.2(CATHODE) J24.21
PWRSEL: J24.39 U3.7(PWRSEL)
REG3V3: C2511.1 R3158.1(A) R3159.2 U3.37(REGV) U580.8(VCC)
RUN_PG: J24.92 TP83.1(PIN1)
RXD0: J24.51 R3041.1
SCL0: J24.80 U57.23(SCL)
SCL5: J11.20(P20) J24.38 J26.20(P20) R16.2 R3146.2
SCL6: J24.47 R43.2(B)
SDA0: J24.82 U57.24(SDA)
SDA5: J11.21(P21) J24.44 J26.21(P21) R17.2 R3147.2
SDA6: J24.46 R42.2(B)
SDX_CLK: J24.57 R3141.1
SDX_CMD: J24.62 R3140.1
SDX_D0: J24.63 R3142.1
SDX_D1: J24.67 R3143.1
SDX_D2: J24.69 R3138.1
SDX_D3: J24.61 R3139.1
SDX_DET: J24.76 R3132.1 R3144.1
SWCLK: J7.3 R3044.1 TP63.1(PIN1) U18.20(SWCLK)
SWDIO: J7.2 R3043.2 TP62.1(PIN1) U18.19(SWDIO)
SWITCH: R3054.1 SW2.2 U18.10(SPI1_CS)
TOUCH_INT_B: J24.25 R120.2(B)
TP_RST: J24.24 R121.2(B)
TXD0: J24.55 R3042.1
USB1_DM: R122.1(A) U5.6(C21) U600.10(DM1)
USB1_DP: R123.1(A) U5.1(C11) U600.11(DP1)
USB2_DM: U3.42(USBDM) U600.8(DM2)
USB2_DP: U3.41(USBDP) U600.9(DP2)
USB5V_AD: R3064.1(A) R3065.1 R3155.1(A) U18.8(ADC_2)
USB5V_AD_C: J24.96 R3155.2(B)
USB_N: J25.3 U600.15(DMU)
USB_P: J25.5 U600.16(DPU)
USB_XIN: C2256.1 U600.3(XIN) Y10.1
USB_XOUT: C2255.1 U600.2(XOUT) Y10.3
USBOTG_ID: J25.1 R12.2
VD18: C2498.1 U600.12(VD18_O) U600.28(VD18)
VD33: C2494.1 C2497.1 R3149.2(B) R3152.2(B) U600.13(VD33) U600.21(VD33_O) U600.26(OVCJ)
VLED+: C76.1 C78.1 D10.C J21.29 J21.30 J21.31 TP33.1(PIN1)
VLED-: J21.25 J21.26 J21.27 R89.1(A) R90.1(A) R91.1(A) R3063.1(A)
VOLDN: J24.56 U3.48(VOLDN)
VOLUP: J24.58 U3.39(VOLOP)
WL_NDIS: J24.89 TP77.1(PIN1)
N1478133: D11.C J17.2 R42.1(A) R114.1
N1478157: D12.C J17.1 R43.1(A) R115.1
N1478281: C81.1 D14.C J17.4 R117.2 R121.1(A) TP28.1(PIN1)
N1478289: C82.1 D13.C J17.5 R118.2 R120.1(A) TP29.1(PIN1)
N12332208: J9.2 R125.1 TP60.1(PIN1) U12.5(VO1)
N12332215: J9.1 TP61.1(PIN1) U12.8(VO2)
N12333733: Q6.3(D) R124.2 U12.1(SD)
N12334307: C86.1 U12.2(BP) U12.3(IN+)
N12334479: R125.2 R126.1 U12.4(IN-)
N12334672: C87.2 R126.2
N12335205: C87.1 R127.2(B) R128.2(B) TP58.1(PIN1)
N12373140: R368.2(B) U57.1(CLKIN)
N12374321: C383.1 R370.2(B) U57.8(VLOGIC)
N12375648: C384.1 U57.10(REGOUT)
N12375668: R371.2(B) U57.11(FSYNC)
N12378079: C386.2 U57.20(CPOUT)
N12396095: R3039.1 R3040.1 U18.1(BOOT0)
N12403489: R3042.2 U18.18(U1_RX)
N12403491: R3041.2 U18.17(U1_TX)
N12412618: C2480.1 D17.1 D18.1 TP64.1(PIN1) U60.1(IN) U60.3(EN)
N12412734: R3049.2 R3051.2 U60.4(FB)
N12455505: J13.15(P15) Q3.3(D) U4.A2(CEC)
N12499716: D19.2(CATHODE) Q5.3(D)
N12720539: D10.A L5.2 U6.3(SW)
N12720829: C73.1 R87.2(B) R88.1(A) R3066.2(B) U6.2(CTRL)
N12720857: R89.2(B) U6.6(FB)
N12720893: C74.1 U6.5(COMP)
N12836963: J13.19(P19) R3058.1
N12950668: F1.1(P1) J2.A9 J2.B9 TP41.1(PIN1)
N12951060: J14.2(P2) R122.2(B) U5.4(C22)
N12951086: J14.3(P3) R123.2(B) U5.3(C12)
N12951166: R3086.2(B) R3088.2(B) U597.11(FB)
N12951176: C2483.2 R3087.1(A)
N12951178: R3087.2(B) U597.1(IB)
N12951234: L634.1 U597.2(SW1) U597.21(SW2)
N12951240: L634.2 R3089.1(A) U597.18(CSP)
N12951278: R3090.2(B) R3091.1(A) U597.9(REG)
N12951318: C2492.1 R3094.2 R3096.2 R3102.1(A) TP45.1(PIN1) U597.5(VCC)
N12951326: D20.2(CATHODE) U597.23(C\H\G\)
N12951328: D20.1(ANODE) R3095.1(A)
N12951350: R3097.1(A) U597.10(A\C\O\K\)
N12951358: R3098.2(B) R3101.2(B) R3103.2(B) R3137.2(B) TP47.1(PIN1) U597.12(NTC)
N12951362: J23.2 R3098.1(A)
N12951368: R3099.2(B) U597.26(FREQ)
N12951370: D21.2(CATHODE) U597.22(B\O\O\S\T\)
N12951372: D21.1(ANODE) R3100.1(A)
N12951392: R3102.2(B) R3104.2(B) U597.16(VB)
N12951398: C2493.1 U597.8(TMR)
N12951408: R3105.2(B) U597.6(ILIM)
N12951410: R3106.2(B) U597.13(ISET)
N12951412: R3107.2(B) U597.14(OLIM)
N12951420: R3105.1(A) R3108.1(A)
N12951466: J2.A5 R3133.1
N12951468: J2.B5 R3134.1
N12951536: J16.1(DAT2) R3138.2
N12951538: J16.2(CD/DAT3) R3139.2
N12951540: J16.3(CMD) R3140.2
N12951542: J16.5(CLK) R3141.2
N12951544: J16.7(DAT0) R3142.2
N12951546: J16.8(DAT1) R3143.2
N12951548: J16.9(DET) R3144.2
N13031831: R3148.2(B) U600.14(REXT)
N13033689: R3149.1(A) U600.17(XRSTJ)
N13034107: R3150.1(A) R3151.1(A) U600.18(VBUSM)
N13037306: R3152.1(A) U600.19(BUSJ)
N13080242: TP75.1(PIN1) U3.47(DASCLK)
N13080246: TP76.1(PIN1) U3.46(DALRCK)
N13080250: TP74.1(PIN1) U3.45(DAMCLK)
N13080254: TP67.1(PIN1) U3.44(SDOUT)
N13080452: TP68.1(PIN1) U3.1(SPDIFO)
N13080512: C2503.1 C2504.1 FB8.1 U3.34(AVDD2)
N13080672: C2501.1 C2502.1 FB9.1 U3.29(AVDD1)
N13080802: TP70.1(PIN1) U3.16(SDIN)
N13080806: TP71.1(PIN1) U3.17(ASSCLK)
N13080814: TP72.1(PIN1) U3.19(ADLRCK)
N13080818: TP73.1(PIN1) U3.20(ADMCLK)
N13089026: TP82.1(PIN1) U3.23(TEST)
N13097462: C2507.1 U3.26(VREF)
N13098112: C2508.2 C2509.1 R3158.2(B) U501.1(VDD)
N13115240: D1.1(ANODE) R3.2
N123465088: R373.2(B) U57.9(AD0)
N124996560: D19.1(ANODE) R3060.2
N1308043411: TP69.1(PIN1) U3.12(LEDO)
N1308043429: TP81.1(PIN1) U3.31(LOBS)

Pads without a net: J13 2; J21 6 24 28; J24 3 4 5 6 9 10 11 12 15 16 17 18 19 64 68 70 72 73 75 95 100; J25 2 4 6 9 10 11 12 16 18 22 24 51 53 57 59 63 65 69 70 71 72 76 78 82 84 88 90 99 100; J26 11 12 14 15; U3 13 15 21 25 28 43; U4 B1; U57 2 3 4 5 6 7 14 15 16 17 19 21 22; U580 6 7; U600 22 23 24 25 27

## Via types
v1: diameter 0.508, hole 0.254, TOP to BOTTOM, 846 vias

## Routing (per net, layer and track width the routed paths; a pad name or vN(x,y) marks a point on that pad's centre or on a via; arc(x,y) is an arc through that point)
3V3: length 13.4
  TOP w0.254: U57.13 74.01,92.74 73.98,92.77 C385.1
  TOP w0.305: R3.1 63.75,80.39 v1(63.5,80.64) ; v1(73.66,62.23) 73.79,62.36 R117.1 ; v1(78.74,66.67) 78.91,66.85 R115.2 ; C385.1 74.8,93.47 v1(74.93,93.34) ; R3066.1 v1(43.85,17.02) ; R118.1 74.17,57.66 v1(73.66,57.15) ; R114.2 73.91,65.02 v1(73.66,64.77) ; v1(78.74,87) 78.49,87.25 R370.1 ; v1(66.04,99.06) 65.41,99.69 R3145.2
  TOP w0.381: v1(31.62,5.71) 31.4,5.71 R3153.1 31.14,6.48 v1(31.62,6.48)
  vias: v1(67.31,92.08) v1(68.58,92.08) v1(80.64,55.88) v1(80.64,54.61) v1(81.92,55.88) v1(81.92,54.61)
3V3_SD: length 29.9
  TOP w0.305: R3132.2 v1(20.98,16.23)
  TOP w0.381: J16.4 20.39,5.15 22.23,6.99 27.05,6.99 v1(29.21,4.83) C24.1 30.1,6.19 R3153.2
  BOTTOM w0.381: v1(20.98,16.23) 29.21,8 v1(29.21,4.83)
5V: length 15.5
  TOP w0.305: R3093.2 v1(72.42,6.6) ; v1(75.21,7.95) 75.16,8 R3091.2
  L03 w0.305: 66.45,2.41 69.09,2.41 69.85,1.65 71.36,1.65 72.42,2.72 v1(72.42,6.6) 73.82,8 75.16,8 v1(75.21,7.95)
  vias: v1(12.7,65.41) v1(12.7,64.14) v1(13.97,65.41) v1(13.97,64.14) v1(32.11,32.14) v1(33.38,32.14) v1(34.65,32.14) v1(64.55,1.82) v1(64.55,1.02) v1(65.57,1.82) v1(65.57,1.02) v1(66.58,1.82) v1(66.58,1.02)
GND: length 283.2
  TOP w0.152: U57.18 71.51,91.03 v1(71.74,90.81)
  TOP w0.203: J25.56 v1(23.24,90.24) ; J25.31 24.86,85.44 v1(24.38,84.96) ; v1(20.95,85.6) 21.11,85.44 J25.32 ; v1(58.42,93.34) 58.52,93.44 J24.71 ; v1(58.42,85.72) 58.54,85.84 J24.33 ; J25.74 23,93.84 v1(23.24,93.6) ; J13.4 3.79,83.55 v1(3.68,83.44) ; J25.44 22.94,87.84 v1(23.24,88.14) ; J13.13 6.99,85.35 7.37,85.72 v1(7.49,85.72) ; J24.32 56.67,85.44 57.15,84.96 v1(57.15,84.45) ; v1(60.96,89.53) 60.65,89.84 J24.53 ; J24.23 58.7,83.84 58.42,83.57 v1(58.42,83.19) ; J24.8 v1(55.25,80.64) ; J24.52 57.06,89.44 v1(57.15,89.53) ; v1(60.96,81.92) 60.89,81.84 J24.13 ; J24.1 58.49,79.44 v1(58.42,79.38) ; J25.62 v1(23.24,91.44) ; v1(21.08,97.28) 21.24,97.44 J25.92 ; J25.68 21.28,92.64 21.08,92.84 ; J24.43 58.76,87.84 58.42,87.5 v1(58.42,87) ; v1(55.24,93.34) 55.74,93.84 J24.74 ; v1(20.95,84.07) 21.12,84.24 J25.26 ; v1(55.24,81.92) 55.32,81.84 J24.14 ; J25.67 v1(26.49,92.64) ; v1(24.38,82.55) 24.88,83.04 J25.19 ; J25.61 v1(26.42,91.44) ; v1(57.15,90.81) 56.91,91.04 J24.60 ; U4.B2 U4.C2 v1(11.3,85.72) ; v1(24.38,87.12) 24.86,86.64 J25.37 ; v1(7.49,84.07) 7.42,84.15 J13.7 ; v1(21.08,98.81) 21.25,98.64 J25.98 ; v1(58.42,92.08) 58.59,92.24 J24.65 ; J24.98 56.93,98.64 v1(57.15,98.42) ; v1(55.24,79.38) 55.31,79.44 J24.2 ; v1(20.95,86.49) 21.11,86.64 J25.38 ; J24.7 v1(58.42,80.64) ; J13.16 4.22,85.95 3.81,86.36 v1(3.56,86.36) ; J25.80 23.29,95.04 23.5,95.24 v1(23.5,95.25) ; v1(3.56,84.84) 3.64,84.75 J13.10 ; J25.86 23.27,96.24 v1(23.5,96.01) ; U597.27 64.2,12.23 v1(63.91,11.94) 64.03,11.83 U597.28 ; J24.59 58.66,91.04 v1(58.42,90.81) ; v1(55.24,83.19) 55.5,83.44 J24.22 ; J24.42 56.7,87.44 v1(57.15,87) ; v1(55.24,92.08) 55.41,92.24 J24.66 ; v1(24.26,98.64) J25.97 ; J25.50 v1(23.24,89.04)
  TOP w0.254: v1(83.47,81.2) 83.52,81.25 J11.7 ; v1(83.57,75.18) 83.63,75.25 J11.19 ; U3.33 65.46,46.87 66.23,47.64 C2503.2 ; v1(69.38,39.23) 69.54,39.4 U3.14 ; U3.24 69.71,44.4 69.38,44.06 v1(69.38,43.68) ; v1(83.47,79.7) 83.52,79.75 J11.10 ; v1(83.47,82.7) 83.52,82.75 J11.4 ; v1(69.24,14.73) U597.15 68.11,15.12 68.51,15.52 v1(68.51,15.67) ; v1(89.03,42.2) 88.02,42.2 J21.G2 v1(87,42.2) ; U3.36 63.96,44.65 v1(64.3,44.31) ; U600.1 37.37,46.39 v1(36.8,45.82) ; v1(83.6,78.23) 83.62,78.25 J11.13 ; J11.1 83.52,84.25 v1(83.47,84.2) ; v1(84.58,61.25) J17.3 ; v1(63.91,11.94) v1(63.15,11.94) ; J11.16 v1(83.57,76.75)
  TOP w0.305: D12.A 78.41,65.07 v1(78.11,64.77) ; v1(41.27,58.55) 41.27,57.9 C2496.2 42.24,57.51 42.55,57.82 v1(42.55,58.55) ; R3106.1 v1(72.42,14.35) ; v1(39.26,37.85) 39.51,37.6 C2474.2 ; R368.1 72.77,86.11 v1(73.03,86.36) ; C2509.2 70.14,54.98 v1(70.01,55.11) ; v1(46.35,57.28) 46.23,57.15 R3150.2 ; R3108.2 v1(75.31,5.21) ; v1(70.01,35.42) 70.17,35.27 C2499.2 70.17,33.67 69.89,33.4 Y11.2 70.85,32.69 71.28,32.26 v1(71.28,32.25) 71.28,30.22 70.77,29.71 v1(67.47,29.71) 67.59,29.83 Y11.4 66.89,30.79 66.58,31.1 66.58,33.52 67.19,34.12 C2500.2 67.19,35.07 v1(66.84,35.42) ; C82.2 74.17,59.18 v1(73.66,59.69) ; v1(41.64,29.6) 41.2,29.16 U18.15 ; J21.4 85.41,40.6 84.67,40.6 v1(84.45,40.39) ; C2503.2 66.23,48.45 66.53,48.76 v1(66.84,48.76) 66.58,49.01 C2504.2 66.58,50.41 v1(66.84,50.66) ; v1(73.66,79.38) 73.53,79.5 R3044.2 74.39,80.23 74.52,80.37 J7.4 ; R3103.1 v1(72.17,11.56) 72.17,11.27 R3088.1 ; R3148.1 46.64,44.93 v1(46.99,44.58) ; C2476.2 v1(42.02,37.09) 42.43,37.49 Y2.4 41.7,38.17 41.26,38.61 41.26,40.77 41.51,41.03 v1(44.81,41.03) 44.73,40.94 Y2.2 45.78,40.07 46.08,39.77 v1(46.08,39.76) 46.08,36.55 v1(45.86,36.33) C2475.2 ; C2511.2 59.57,43.52 v1(59.34,43.3) ; v1(36.8,45.82) C2255.2 36,44.16 v1(36,41.34) Y10.2 37.08,40.56 37.38,40.26 40.26,40.26 40.64,40.64 v1(40.64,43.31) 40.57,43.24 Y10.4 39.38,43.95 39.78,44.35 C2256.2 40.26,44.96 v1(40.64,44.58) ; R3092.1 v1(75.31,6.6) ; v1(10.03,88.77) 9.88,88.62 R3062.1 ; v1(71.92,50.66) 71.66,50.41 C2510.2 ; R3134.2 v1(9.43,67.31) ; J26.19 76.27,111.69 v1(76.2,111.76) ; v1(84.23,34.67) 84.77,35.2 85.41,35.2 J21.22 ; v1(37.83,27.69) 37.83,27.86 37.52,28.17 R3053.2 ; v1(74.93,111.76) 74.77,111.6 J26.16 ; D14.A 78.15,61.01 v1(78.11,60.96) ; R12.1 v1(17.78,79.38) ; R371.1 78.49,92.33 v1(78.74,92.08) ; v1(78.74,88.27) 78.49,88.52 C383.2 ; v1(70.65,49.39) 70.26,49.77 C2501.2 ; v1(13.08,87.88) 12.95,87.75 Q4.2 ; C2479.2 v1(38.24,37.85) ; v1(89.15,36.1) 89.15,36.1 J21.19 ; v1(72.39,93.34) 72.52,93.47 C385.2 ; v1(40.01,58.55) 40.01,57.82 39.7,57.51 C2497.2 39.04,57.51 38.73,57.82 v1(38.73,58.55) ; C2493.2 72.34,8 v1(72.44,7.9) ; R3104.1 v1(72.93,17.94) ; v1(89.03,31.75) 88.98,31.8 J21.G1 ; C2502.2 69.88,48.25 v1(70.01,48.12) ; R3133.2 v1(9.43,68.58) ; J26.7 v1(70.27,111.51) ; v1(89.15,39.5) 88.95,39.7 J21.7 ; v1(37.19,32.14) 36.94,31.88 R3065.2 ; J21.10 84.77,38.8 v1(84.45,39.12) ; R3090.1 v1(75.18,9.4) ; v1(73.06,50.66) 73.31,50.41 C2507.2 ; R3160.1 v1(73.95,45.33) ; v1(37.19,35.31) 36.97,35.09 R3059.1 36.48,33.94 36.27,34.16 Q5.2 ; C80.2 v1(78.11,57.15) ; C2495.2 43.43,56.9 v1(43.81,57.28) ; D13.A 78.41,58.97 78.11,58.67 v1(78.11,58.42) ; C386.1 69.63,89.76 v1(69.85,89.53) ; R3107.1 v1(72.42,15.75) ; C81.2 73.79,60.83 v1(73.66,60.96) ; v1(43.81,44.58) 44.17,44.93 C2494.2 ; C2508.1 68.87,54.98 v1(68.74,55.11) ; v1(78.11,63.5) 78.57,63.04 D11.A ; R3039.2 v1(47.33,33.43) ; J26.4 v1(68.77,111.51) ; v1(38.1,57.28) 37.34,56.52 C2498.2 ; J26.1 v1(67.27,111.51) ; C384.2 78.49,91.06 v1(78.74,90.81) ; v1(78.74,89.53) 78.49,89.79 R373.1 ; J21.16 84.63,37 84.23,36.61 v1(84.23,36.2) ; J21.23 89.15,34.9 v1(89.15,34.9) ; v1(89.15,37.97) 89.08,37.9 J21.13 ; C24.2 v1(32.51,4.83) ; J26.13 v1(73.27,111.51) ; J26.10 v1(71.77,111.51)
  TOP w0.381: v1(15.68,49.75) 15.68,49.59 16.13,49.15 ; v1(6.35,24.13) 5.97,23.75 J20.6 ; 16.13,49.15 U5.2 ; 16.13,49.15 16.51,49.53 v1(16.51,49.78) ; U580.5 v1(56.26,34)
  TOP w0.508: J14.5 10.32,53.32 v1(10.32,52.07)
  GND02 w0.178: 2.61,64.4 J2.3 2.61,62.94 ; 11.38,44.67 J14.4 ; J14.4 12.82,44.67 ; J14.4 11.38,43.23 ; J14.4 12.82,43.23 ; 4.35,62.94 J2.4 ; J2.4 6.41,64.4 ; J2.4 4.35,64.4 ; J2.4 6.41,62.94 ; J13.21 6.18,86.92 ; J13.21 3.27,88.78 ; J13.21 6.18,88.78 ; 3.27,80.72 J13.22 ; J13.22 6.18,80.72 ; J13.22 3.27,82.58 ; J13.22 6.18,82.58 ; 2.82,82.58 J13.20 2.82,80.72 ; 4.35,71.58 J2.1 ; J2.1 6.41,71.58 ; J2.1 4.35,73.04 ; J2.1 6.41,73.04 ; J14.5 12.07,52.93 ; J14.5 12.07,55.07 ; J14.5 9.93,52.93 ; J14.5 9.93,55.07 ; SW2.1 5.23,96.12 ; SW2.1 5.23,97.88 ; SW2.1 3.67,97.88 ; SW2.1 3.67,96.12 ; J14.6 12.07,41.97 ; J14.6 9.93,41.97 ; J14.6 9.93,39.83 ; J14.6 12.07,39.83 ; 2.61,71.58 J2.2 2.61,73.04 ; 1.36,86.92 J13.23 2.82,88.78
  vias: v1(1.05,55.37) v1(1.43,86.36) v1(1.43,83.82) v1(1.43,80.01) v1(1.43,77.47) v1(1.43,74.93) v1(1.43,71.12) v1(1.43,68.58) v1(1.43,66.04) v1(1.43,62.23) v1(1.43,59.69) v1(1.43,57.15) v1(1.43,39.37) v1(1.43,36.83) v1(1.43,34.29) v1(1.43,31.75) v1(1.43,28.83) v1(1.43,26.67) v1(1.43,16.51) v1(1.43,13.97) v1(1.43,8.89) v1(2.45,55.37) v1(2.79,70.1) v1(2.79,67.44) v1(3.05,65.41) v1(3.97,80.01) v1(3.97,77.47) v1(3.97,74.93) v1(3.97,71.12) v1(3.97,62.23) v1(3.97,59.69) v1(3.97,57.15) v1(3.97,36.83) v1(3.97,34.29) v1(3.97,31.75) v1(3.97,28.83) v1(3.97,26.67) v1(3.97,16.51) v1(3.97,13.97) v1(3.97,8.89) v1(4.06,25.02) v1(6.51,80.01) v1(6.51,77.47) v1(6.51,74.93) v1(6.51,64.77) v1(6.51,62.23) v1(6.51,59.69) v1(6.51,57.15) v1(6.51,39.37) v1(6.51,36.83) v1(6.51,34.29) v1(6.51,31.75) v1(6.51,28.83) v1(6.51,26.67) v1(6.48,25.15) v1(6.51,16.51) v1(6.51,13.97) v1(6.51,11.43) v1(6.51,8.89) v1(6.64,55.24) v1(7.11,66.29) v1(7.49,82.68) v1(8.38,63.5) v1(9.02,66.29) v1(9.05,74.93) v1(9.05,72.39) v1(9.05,64.77) v1(9.05,62.23) v1(9.05,60.96) v1(9.05,59.69) v1(9.05,58.42) v1(9.05,57.15) v1(9.05,39.37) v1(9.05,36.83) v1(9.05,11.43) v1(9.05,8.89) v1(9.05,6.35) v1(9.05,3.81) v1(9.05,1.27) v1(10.32,59.69) v1(10.32,58.42) v1(10.32,55.88) v1(10.32,49.53) v1(10.32,46.99) v1(10.32,44.45) v1(10.92,57.28) v1(11.59,8.89) v1(11.59,6.35) v1(11.59,3.81) v1(11.59,1.27) v1(13.5,6.35) v1(13.5,3.81) v1(13.5,1.27) v1(13.59,45.59) v1(13.97,13.97) v1(14.48,45.59) v1(15.75,16.13) v1(15.88,12.7) v1(16.64,2.54) v1(16.67,1.27) v1(16.76,15.88) v1(17.78,12.7) v1(17.78,10.79) v1(17.91,2.54) v1(17.94,1.27) v1(19.21,1.27) v1(19.68,14.61) v1(19.68,12.7) v1(19.68,10.79) v1(19.94,6.99) v1(20.83,7.75) v1(21.59,12.7) v1(21.59,10.79) v1(23.5,12.7) v1(23.5,10.79) v1(24.64,4.45) v1(25.4,10.79) v1(25.53,3.81) v1(27.3,10.79) v1(29.21,10.79) v1(31.86,24.01) v1(34.29,4.95) v1(34.53,23.88) v1(34.53,22.61) v1(34.65,20.71) v1(35.56,6.99) v1(35.56,4.95) v1(35.59,3.68) v1(35.92,23.88) v1(36.7,6.1) v1(36.86,3.68) v1(37.07,23.5) v1(37.07,22.36) v1(37.85,4.83) v1(38.72,22.23) v1(39.24,3.81) v1(40.12,22.23) v1(41.27,22.23) v1(44.86,19.94) v1(44.86,19.05) v1(44.86,18.03) v1(45.12,17.4) v1(46.39,18.03) v1(46.39,9.02) v1(46.77,16.64) v1(46.77,15.37) v1(47.4,9.02) v1(47.66,18.03) v1(48.04,16.64) v1(48.04,15.37) v1(48.04,14.1) v1(48.04,10.03) v1(48.67,9.02) v1(48.93,14.1) v1(49.94,14.99) v1(49.94,13.72) v1(49.94,9.02) v1(49.94,7.87) v1(51.21,9.02) v1(51.21,7.87) v1(52.48,10.29) v1(52.48,9.02) v1(52.48,7.87) v1(53.75,15.37) v1(53.75,14.1) v1(53.75,10.29) v1(53.75,9.02) v1(53.75,7.87) v1(55.02,15.37) v1(55.02,14.1) v1(57.82,13.21) v1(57.82,12.06) v1(57.82,10.67) v1(57.82,9.14) v1(57.82,7.49) v1(57.82,5.84) v1(57.82,4.83) v1(57.82,1.82) v1(57.82,1.02) v1(58.83,1.82) v1(58.83,1.02) v1(59.22,11.56) v1(59.22,7.49) v1(59.22,5.84) v1(59.22,4.83) v1(59.34,9.14) v1(59.85,1.82) v1(59.85,1.02) v1(60.36,9.14) v1(63.15,11.23) v1(63.91,11.23) v1(65.53,18.92) v1(66.04,97.79) v1(66.55,18.03) v1(67.31,99.06) v1(67.31,97.79) v1(67.31,96.52) v1(67.31,95.25) v1(67.34,6.35) v1(67.34,4.32) v1(67.44,18.92) v1(67.69,13.72) v1(67.69,12.83) v1(67.69,11.94) v1(67.72,1.82) v1(67.72,1.02) v1(68.36,7.24) v1(68.36,6.35) v1(68.36,5.33) v1(68.36,4.32) v1(68.58,99.06) v1(68.58,97.79) v1(68.58,96.52) v1(68.74,1.82) v1(68.74,1.02) v1(69.2,16.28) v1(69.53,15.52) v1(69.76,3.94) v1(69.76,3.05) v1(70.36,1.02) v1(71.74,89.79) v1(71.74,88.77) v1(71.69,3.05) v1(72.64,1.27) v1(72.68,90.81) v1(72.68,89.79) v1(72.68,88.77) v1(73.82,90.81) v1(73.82,89.79) v1(73.82,88.77) v1(73.82,3.81) v1(73.82,1.27) v1(74.93,2.41) v1(76.36,3.81) v1(76.36,1.27) v1(77.34,102.23) v1(77.34,100.97) v1(77.34,99.69) v1(77.47,104.78) v1(77.98,16) v1(78.14,23.37) v1(78.39,13.72) v1(78.39,12.45) v1(78.39,11.18) v1(78.74,104.78) v1(78.74,102.23) v1(78.9,8.89) v1(78.9,6.35) v1(78.9,3.81) v1(78.9,1.27) v1(79.25,82.8) v1(79.41,23.37) v1(79.79,12.45) v1(79.79,11.18) v1(79.88,14.35) v1(80.01,104.78) v1(80.01,103.5) v1(80.01,102.23) v1(80.17,24.13) v1(80.26,21.72) v1(80.64,99.69) v1(80.81,84.2) v1(80.81,82.68) v1(80.81,78.61) v1(80.86,81.2) v1(80.86,79.7) v1(80.9,26.04) v1(81.19,12.45) v1(81.19,11.18) v1(81.28,14.22) v1(81.44,3.81) v1(81.44,1.27) v1(81.53,22.86) v1(81.69,36.2) v1(82.55,21.59) v1(82.71,26.67) v1(82.71,24.13) v1(82.68,14.48) v1(82.71,12.45) v1(82.71,11.18) v1(83.69,22.86) v1(83.98,66.04) v1(83.98,63.5) v1(83.98,54.61) v1(83.98,52.07) v1(83.98,49.53) v1(83.98,46.99) v1(83.98,44.45) v1(84.07,14.1) v1(85.25,26.67) v1(85.25,24.13) v1(85.25,21.59) v1(85.25,12.7) v1(85.25,8.89) v1(85.98,14.1) v1(86.36,56.52) v1(86.36,28.32) v1(86.36,10.79) v1(86.49,67.56) v1(86.52,66.04) v1(86.52,62.23) v1(86.52,59.69) v1(86.52,54.61) v1(86.52,52.07) v1(86.52,49.53) v1(86.52,46.99) v1(86.52,44.45) v1(86.49,18.29) v1(86.61,19.81) v1(86.61,16.38) v1(87,31.11) v1(87.79,29.21) v1(87.79,26.67) v1(87.79,24.13) v1(87.79,21.59) v1(87.79,15.24) v1(87.79,12.7) v1(87.79,8.89) v1(88.52,19.94) v1(88.52,16.51) v1(88.52,11.05) v1(88.77,30.99) v1(88.77,28.32) v1(89.06,86.36) v1(89.06,78.74) v1(89.06,76.2) v1(89.06,73.66) v1(89.06,71.12) v1(89.06,68.58) v1(89.06,66.04) v1(89.06,62.23) v1(89.06,59.69) v1(89.06,57.15) v1(89.06,54.61) v1(89.06,52.07) v1(89.06,49.53) v1(89.06,46.99) v1(89.06,44.45) v1(89.15,15.37)
VBAT: length 47.2
  TOP w0.203: R3089.2 70.26,21.21 70.04,20.98 70.04,19.33 67.31,16.6 U597.17
  TOP w0.381: R3097.2 v1(72.55,9.53)
  TOP w0.508: v1(60.61,20.6) R3100.2 R3095.2
  L03 w0.508: v1(72.55,9.53) 73.41,10.38 73.41,11.94 77.07,15.6 v1(77.07,18.92) v1(76.05,18.92) 68.71,18.92 66.17,16.38 61.12,16.38 60.61,16.89 v1(60.61,20.6)
  vias: v1(32.75,27.69) v1(32.75,26.42) v1(33.89,27.69) v1(33.91,26.42) v1(57.15,23.5) v1(57.15,22.23) v1(58.42,23.5) v1(58.42,22.23) v1(59.69,23.5) v1(59.69,22.23) v1(60.96,23.5) v1(60.96,22.23)
VBAT_AD: length 7.6
  TOP w0.381: U18.14 40.55,29.28 40.24,29.6 38.34,29.6 37.73,28.99 R3053.1 R3154.1 R3052.1
VBAT_AD_C: length 83.6
  TOP w0.152: J24.94 54.66,97.84 52.07,95.25 52.07,88.9 v1(52.7,88.27)
  TOP w0.254: R3154.2 35.67,26.8 v1(35.29,26.42)
  L04 w0.145: v1(35.29,26.42) 35.29,27.67 41.27,33.66 41.66,33.66 51.18,43.18 51.18,76.58 52.7,78.11 v1(52.7,88.27)
VBUS: length 48.5
  TOP w0.203: U4.A1 9.89,84.85 10.16,84.58 10.41,84.58 10.69,84.85 U4.C1
  TOP w0.254: 64.46,48.07 U3.35
  TOP w0.305: v1(47.62,57.28) 47.5,57.15 R3151.2 ; v1(62.39,47.49) 63.03,47.49 63.41,47.87 FB8.2 ; v1(62.39,48.76) 62.52,48.63 63.15,48.63 FB8.2 ; R3086.1 74.45,11.46 v1(74.36,11.56) 74.45,11.65 R3137.1 ; FB8.2 64.15,48.38 64.46,48.07 ; v1(70.65,50.66) 70.26,50.66 69.75,51.17 FB9.2 70.26,51.93 v1(70.65,51.93) ; 10.16,84.58 10.16,83.24 10.46,82.94 Q3.1 ; U600.20 42.49,54.3 43.43,55.24 C2495.1 43.39,55.52 C2496.1 ; R3101.1 v1(70.77,11.56)
  TOP w0.381: C2496.1 41.13,55.52 v1(40.64,56.01)
  L04 w0.305: v1(63.41,1.82) 63.44,1.82 64.04,2.41 73.69,2.41 76.83,5.55 76.83,9.08 v1(74.36,11.56) 73.72,12.19 71.41,12.19 v1(70.77,11.56)
  vias: v1(12.7,80.64) v1(12.7,79.38) v1(13.97,80.64) v1(13.97,79.38) v1(19.68,53.34) v1(19.68,52.07) v1(20.95,53.34) v1(20.95,52.07) v1(30.01,15.11) v1(30.01,14.1) v1(31.02,15.11) v1(31.02,14.1) v1(32.04,15.11) v1(32.04,14.1) v1(61.37,1.82) v1(61.37,1.02) v1(62.39,1.82) v1(62.39,1.02) v1(63.41,1.02) v1(67.31,93.34) v1(68.58,93.34) v1(69.22,104.78) v1(69.22,103.5) v1(69.22,102.23) v1(70.48,104.78) v1(70.48,102.23)
